# Altium PCB PCB.PcbDoc (part 1 of 2)
Units mm, origin at the board's own origin, x right, y up, seen from the top; angles counter-clockwise.
Board outline 72.26 x 43 mm, 4 copper layers (Top Layer, Int1 (GND), Int2 (PWR), Bottom Layer), stack 1.684 mm thick; 41 components, 43 nets, 235 pads, 199 vias.
Unrouted connection lines stored in the file: 1.
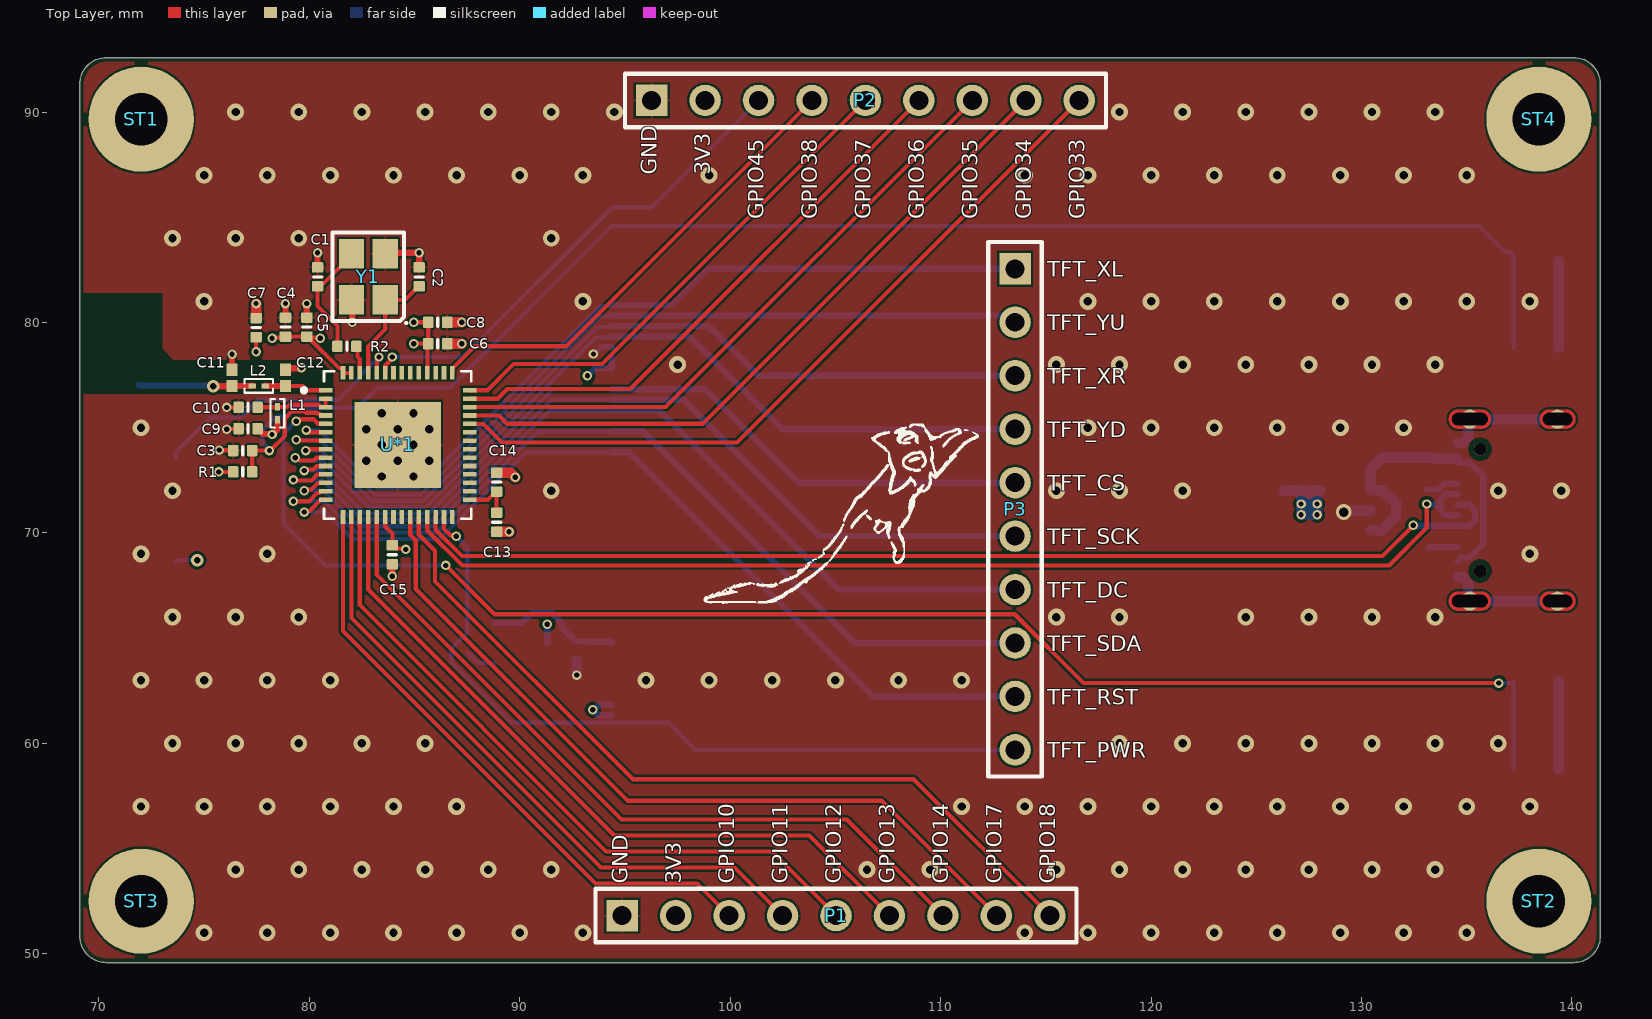
[diagram p0: Top Layer view]
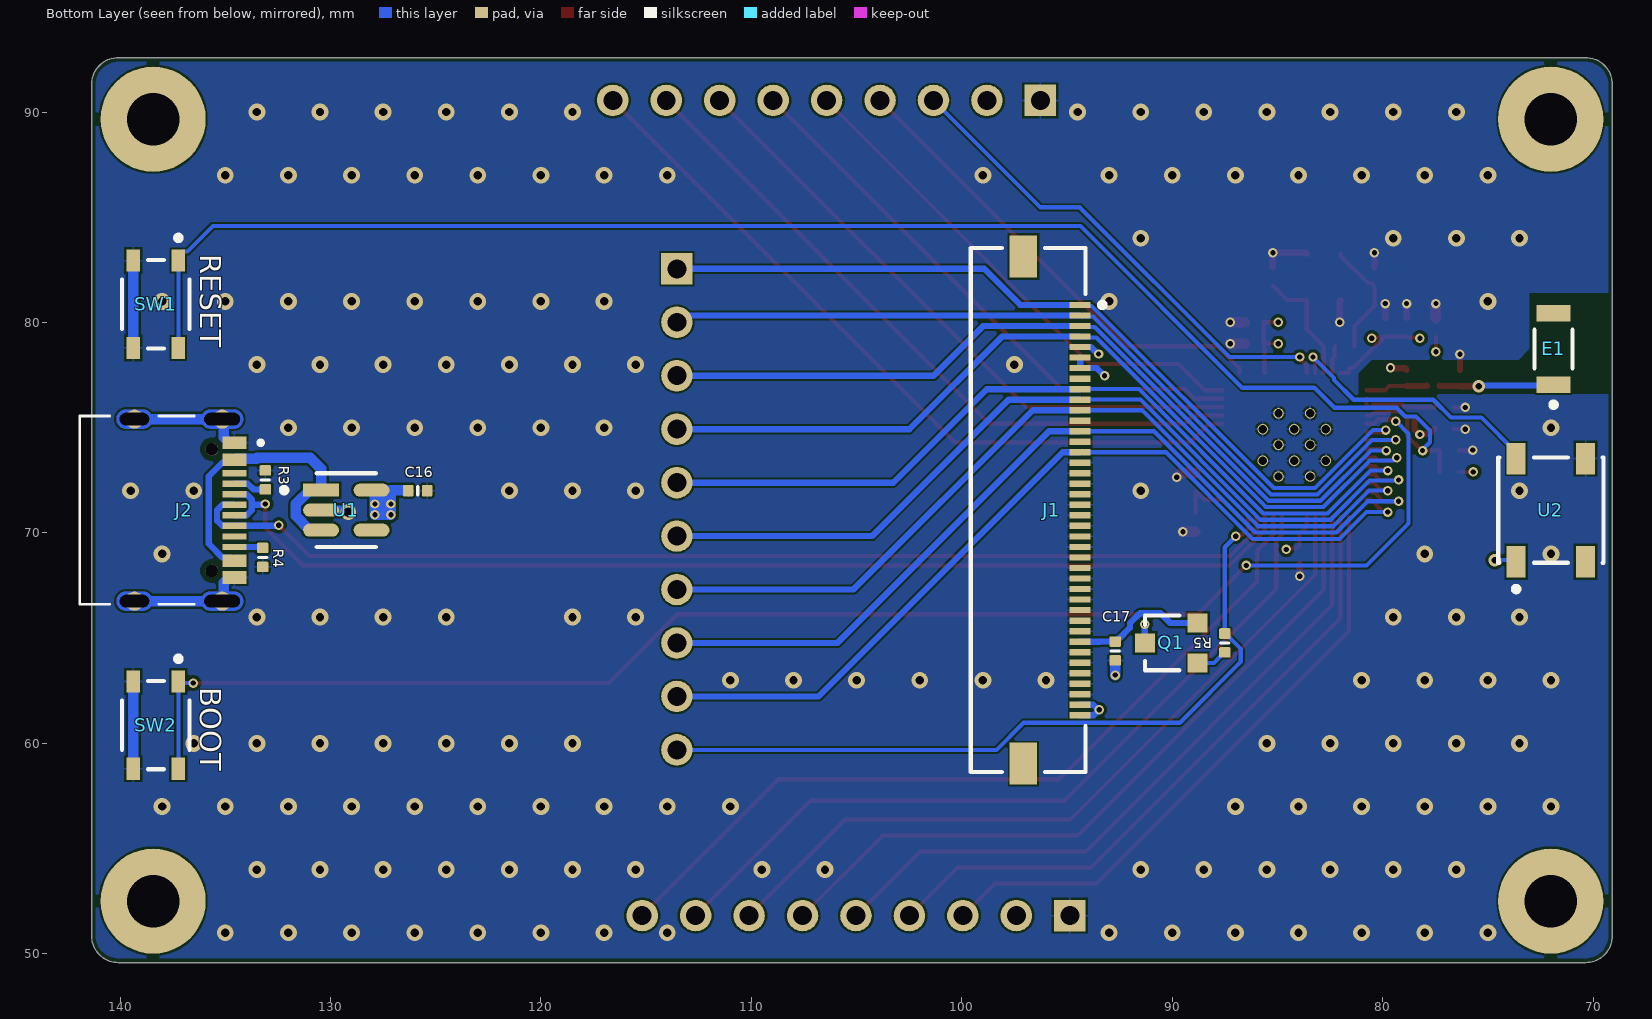
[diagram p1: Bottom Layer view, seen from below]
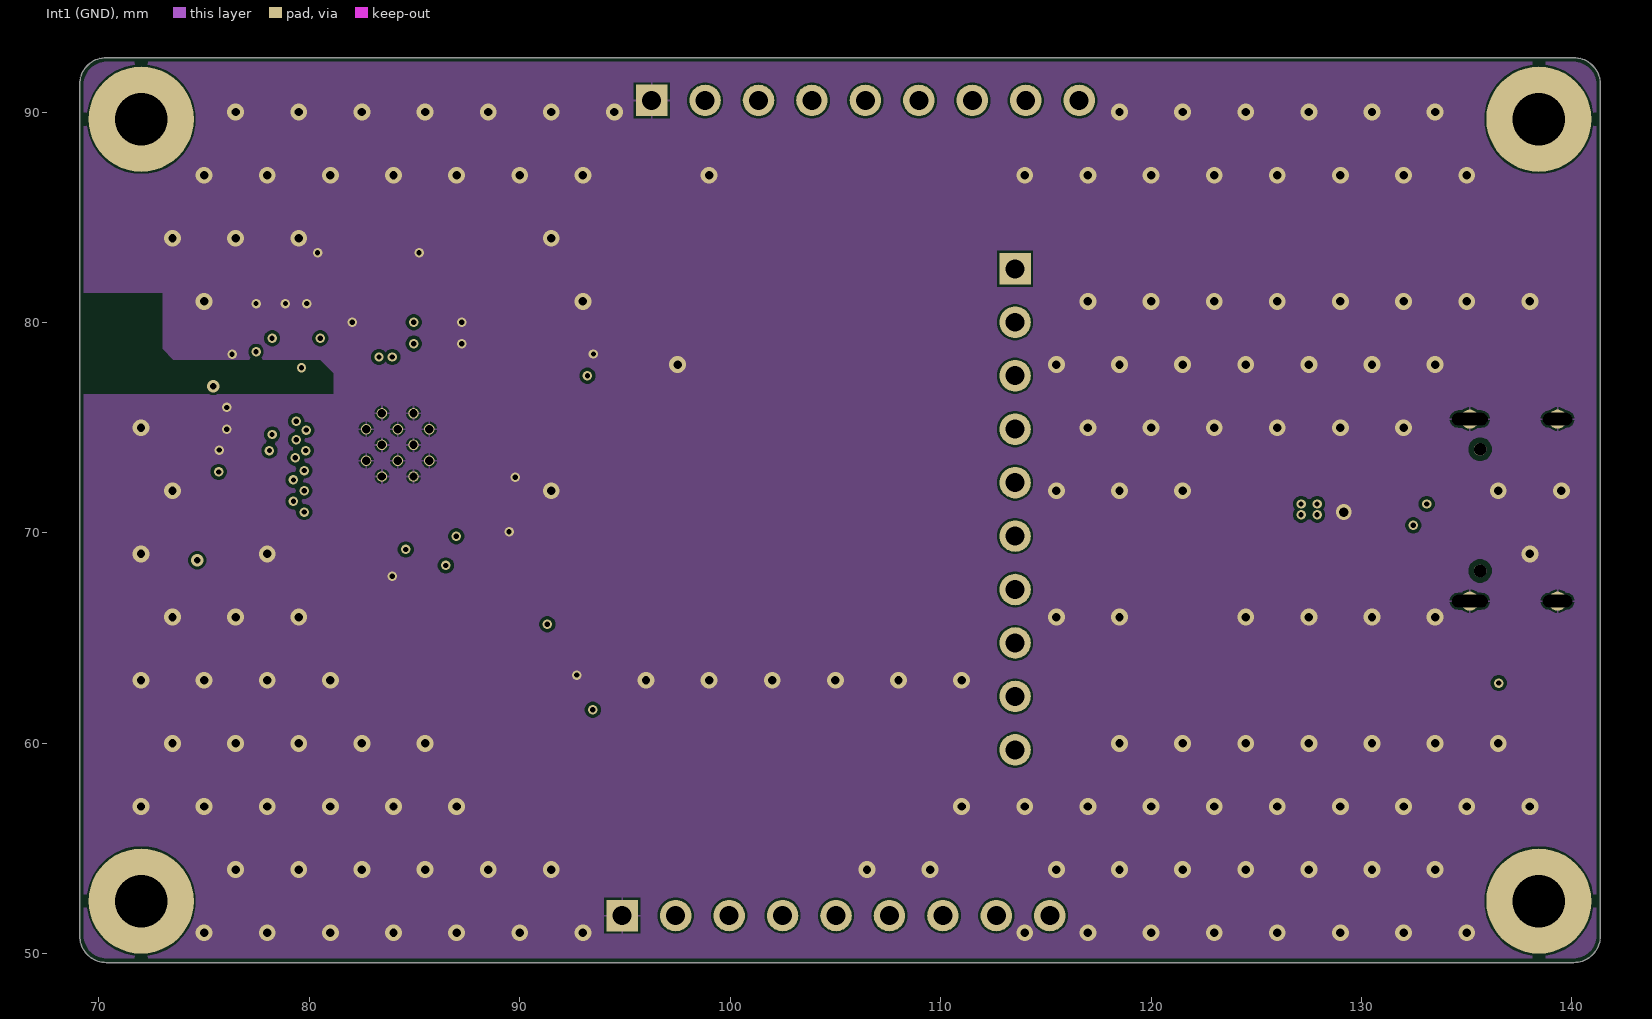
[diagram p2: Int1 (GND)]
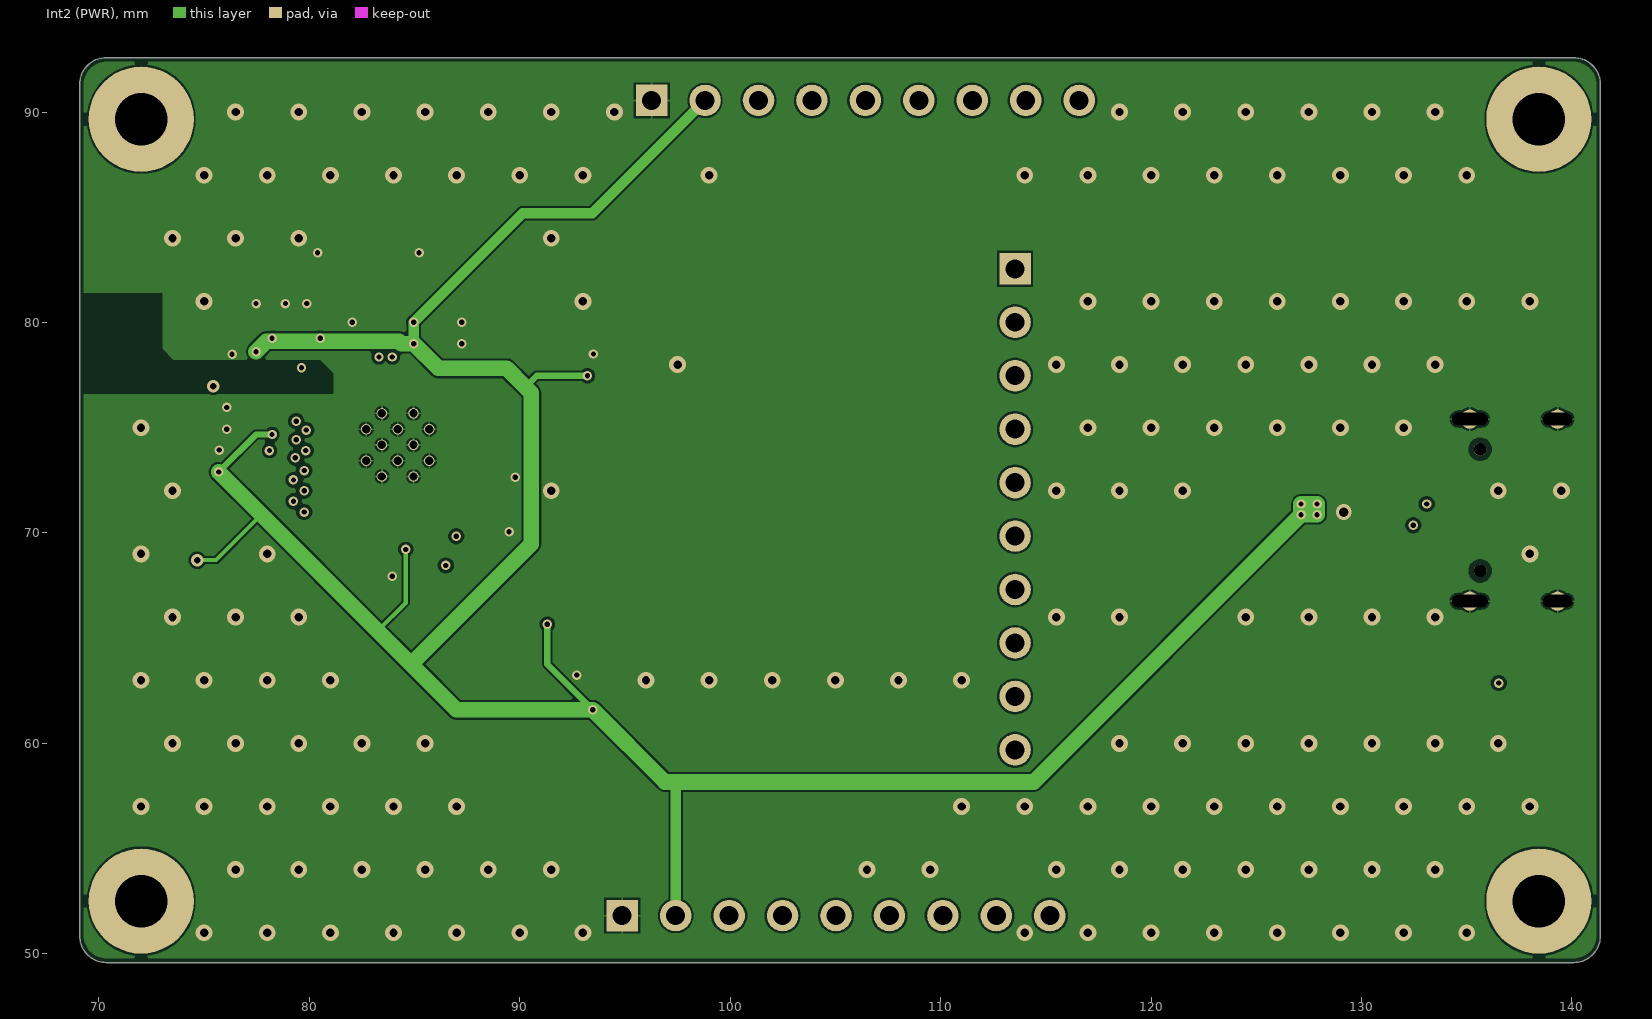
[diagram p3: Int2 (PWR)]
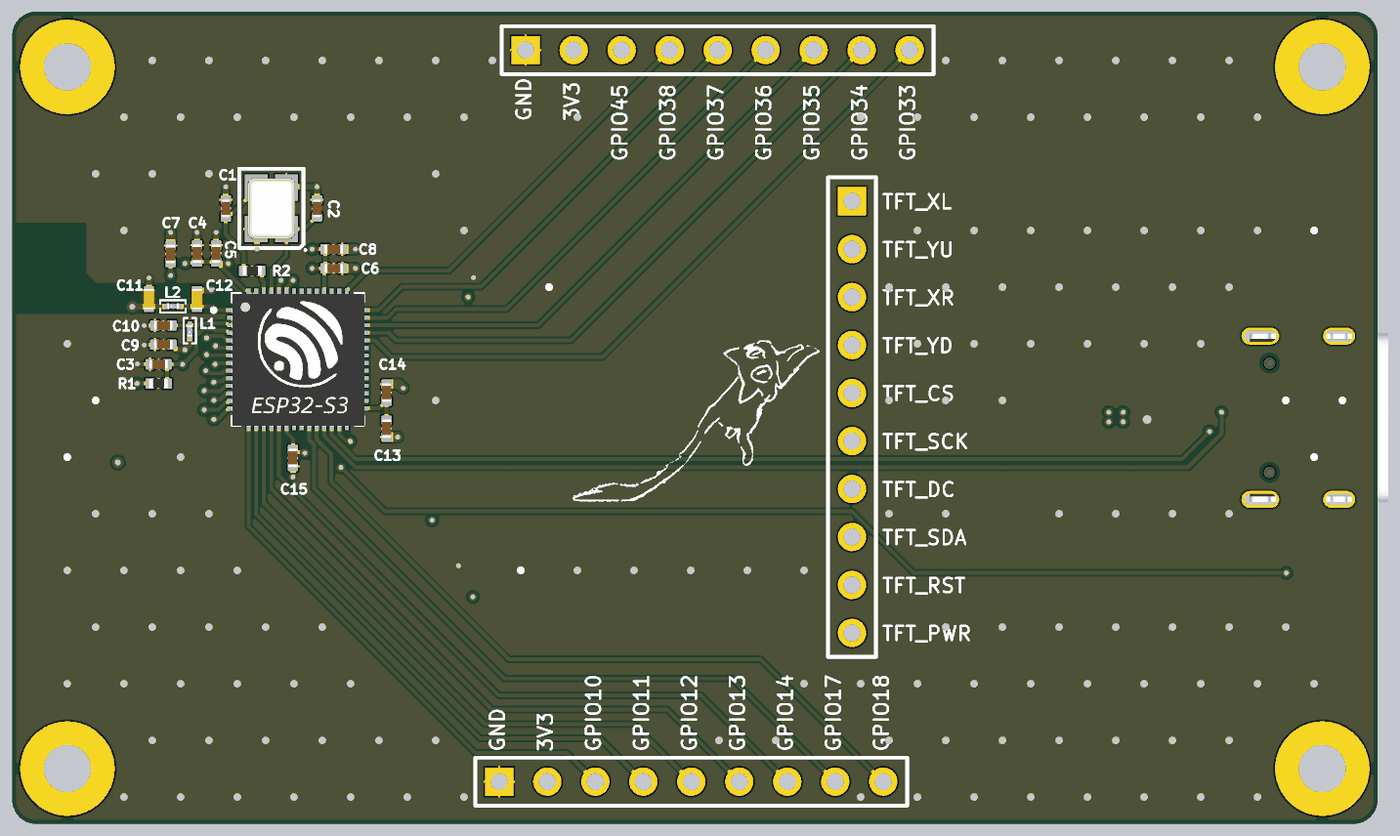
[diagram p4: 3D render of the assembled board from above, using the file's embedded part models]
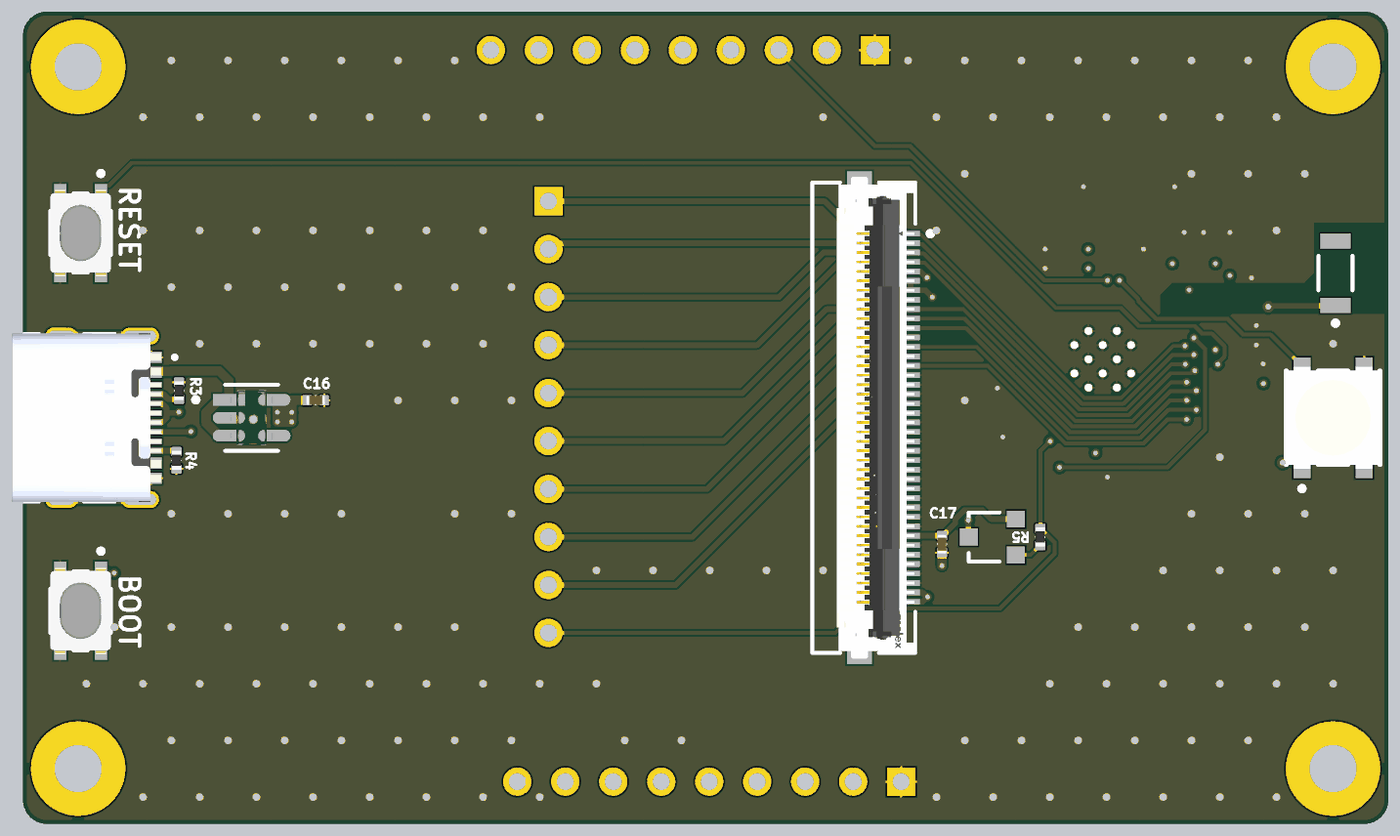
[diagram p5: 3D render of the assembled board from below, using the file's embedded part models]

## Layer stack, top to bottom
Top Solder: solder mask 0.0254, SM-001, Dk 4
Top Layer: signal copper 0.035
Dielectric 1: prepreg 0.1295, PP-017, Dk 4.3
Dielectric 2: prepreg 0.1295, PP-017, Dk 4.3
Int1 (GND): signal copper 0.0152
Dielectric 3: core 1.065, Core-039, Dk 4.8
Int2 (PWR): signal copper 0.0152
Dielectric 4: prepreg 0.1295, PP-017, Dk 4.3
Dielectric 5: prepreg 0.1295, PP-017, Dk 4.3
Bottom Layer: signal copper 0.035
Bottom Solder: solder mask 0.0254, SM-001, Dk 4

## Board outline
69.088,50.853 69.088,91.313 cw(c70.358,91.313) 70.358,92.583 140.081,92.583 cw(c140.081,91.313) 141.351,91.313 141.351,50.853 cw(c140.081,50.853) 140.081,49.583 70.358,49.583 cw(c70.358,50.853)

## Design rules (kind name [scope] priority, off if disabled: settings)
BoardOutlineClearance [All] p1: gap=0.2 ignorepadtopadclearanceinfootprint=FALSE
Clearance [All] p1: gap=0.102 ignorepadtopadclearanceinfootprint=FALSE except(0.127: Arc-Via Track-Via SMDPad-Via THPad-Via Via-Via Via-Fill Via-Poly Via-Region Via-Text; 0.25: Arc-Hole Track-Hole SMDPad-Hole THPad-Hole Via-Hole Fill-Hole Poly-Hole Region-Hole Text-Hole)
ComponentClearance [All] p1: gap=0.102 collisioncheckmode=3 verticalgap=0.102 showdistances=TRUE
DiffPairsRouting [All] p1: maxlimit=0.102 minlimit=0.102 mostfreqgap=0.102 toplayer_minwidth=0.102 toplayer_maxwidth=1816.048 toplayer_prefwidth=0.102 midlayer1_minwidth=0.102 midlayer1_maxwidth=1816.048 midlayer1_prefwidth=0.102 midlayer2_minwidth=0.102 midlayer2_maxwidth=1816.048 midlayer2_prefwidth=0.102 bottomlayer_minwidth=0.102 bottomlayer_maxwidth=1816.048 bottomlayer_prefwidth=0.102 maxuncoupledlength=12.7
Height [All] p1: minheight=0 maxheight=1816.048 prefheight=12.7
HoleSize [All] p1: absolutevalues=TRUE maxlimit=6.3 minlimit=0.2 maxpercent=80.000 minpercent=20.000
HoleToHoleClearance [All] p1: gap=0.25 allowstackedmicrovias=FALSE
MinimumAnnularRing [All] p1: minimumring=0.076
MinimumSolderMaskSliver [All] p1: minsoldermaskwidth=0
PlaneClearance [All] p1: clearance=0.102
PlaneConnect PlaneConnectPowerPads [InPadClass('PowerPads')] p1: planeconnectstyle=Direct reliefexpansion=0.508 reliefentries=4 reliefconductorwidth=0.254 reliefairgap=0.254
PlaneConnect [All] p2: pad.planeconnectstyle=Relief pad.reliefexpansion=0.3 pad.reliefentries=4 pad.reliefconductorwidth=0.102 pad.reliefairgap=0.102 via.planeconnectstyle=Direct via.reliefexpansion=0.3 via.reliefentries=4 via.reliefconductorwidth=0.127 via.reliefairgap=0.127
PolygonConnect PolygonConnectPowerPads [All vs (InPadClass('PowerPads'))] p1: connectstyle=Direct reliefconductorwidth=0.254 reliefentries=4 polygonreliefangle="90 Angle" airgapwidth=0.254
PolygonConnect [All] p2: thpad.connectstyle=Relief thpad.reliefconductorwidth=0.102 thpad.reliefentries=4 thpad.polygonreliefangle="90 Angle" thpad.airgapwidth=0.102 smdpad.connectstyle=Relief smdpad.reliefconductorwidth=0.102 smdpad.reliefentries=4 smdpad.polygonreliefangle="90 Angle" smdpad.airgapwidth=0.102 via.connectstyle=Direct via.reliefconductorwidth=0.127 via.reliefentries=4 via.polygonreliefangle="90 Angle" via.airgapwidth=0.127
RoutingVias [All] p1: holewidth=0.2 width=0.45 viastyle="Through Hole" minholewidth=0.2 minwidth=0.45 maxholewidth=6.3 maxwidth=6.55
SilkToSilkClearance [All] p1: silktosilkclearance=0
SilkToSolderMaskClearance [IsPad] p1: minsilkscreentomaskgap=0.102 clearancetoexposedcopper=TRUE
SolderMaskExpansion [All] p1: expansion=0.075 istentingtop=FALSE
Width [All] p1: maxlimit=1816.048 minlimit=0.102 preferedwidth=0.102
20 further rules are at their usual default settings.

## Classes and differential pairs
component class Components: C16 C17 J1 J2 P1 P2 P3 Q1 R3 R4 R5 ST1 ST2 ST3 ST4 U1 U2

## Components (designator, comment, footprint, x,y, rotation, side; value= is the part's Value field where it differs from the comment)
C1 "Capacitor 12pF +/-10% 50V 0402" CAPC0402(1005)33_L 80.391,82.169 r270 top value=8pF
C2 "Capacitor 12pF +/-10% 50V 0402" CAPC0402(1005)33_L 85.217,82.169 r270 top value=8pF
C3 "Capacitor 1µF +/-20% 10V 0402" CAPC0402(1005)60_L 76.835,73.914 r180 top value=1µF
C4 "Capacitor 1µF +/-20% 10V 0402" CAPC0402(1005)60_L 78.867,79.78 r90 top value=1µF
C5 "Capacitor 100nF +/-20% 10V 0402" CAPC0402(1005)60_L 79.883,79.78 r90 top value=100nF
C6 "Capacitor 1µF +/-20% 10V 0402" CAPC0402(1005)60_L 86.106,78.994 r0 top value=1µF
C7 "Capacitor 10µF +/-40% 6.3V 0402" CAPC0402(1005)60_L 77.47,79.756 r90 top value=10µF
C8 "Capacitor 1µF +/-20% 10V 0402" CAPC0402(1005)60_L 86.106,80.01 r0 top value=1µF
C9 "Capacitor 100nF +/-20% 10V 0402" CAPC0402(1005)60_L 77.089,74.954 r180 top value=100nF
C10 "Capacitor 100nF +/-20% 10V 0402" CAPC0402(1005)60_L 77.089,75.97 r180 top value=100nF
C11 "Capacitor 0.1 uF +/- 5% 16 V 0402" CAPC1005X56X25LL10T15 76.327,77.367 r90 top value=3.3pF
C12 "Capacitor 0.1 uF +/- 5% 16 V 0402" CAPC1005X56X25LL10T15 78.867,77.367 r90 top value=3.3pF
C13 "Capacitor 1µF +/-20% 10V 0402" CAPC0402(1005)60_L 88.9,70.509 r270 top value=1µF
C14 "Capacitor 100nF +/-20% 10V 0402" CAPC0402(1005)60_L 88.9,72.414 r90 top value=100nF
C15 "Capacitor 100nF +/-20% 10V 0402" CAPC0402(1005)60_L 83.947,68.961 r270 top value=100nF
C16 "Capacitor 2,2µF +/-20% 10V 0402" CAPC0402(1005)60_L 125.857,72.009 r180 bottom value=2.2µF
C17 "Capacitor 1µF +/-20% 10V 0402" CAPC0402(1005)60_L 92.71,64.389 r270 bottom value=1µF
E1 "2450AT18A100E" JT-2450AT18A100-2_V 71.882,78.74 r90 bottom
J1 "505110-4091" FP-505110-4091-MFG 96.851,71.083 r270 bottom
J2 "TYPE-C-31-M-12" HRO_TYPE-C-31-M-12 139.319,71.083 r270 bottom
L1 "2 nH" "IND 0201_0603" 78.486,75.692 r90 top
L2 "2nH" "IND 0201_0603" 77.597,76.986 r0 top value="2 nH"
P1 "Header 9" HDR1X9 94.869,51.816 r0 top
P2 "Header 9" HDR1X9 96.266,90.551 r0 top
P3 "Header 10" HDR1X10 113.538,82.55 r270 top
Q1 "2N7002" STM-SOT-23-3_V 90.043,64.77 r90 bottom
R1 "10KR2F" RESC0402(1005)_L 76.835,72.898 r0 top value=10k
R2 "0R2J" RESC0402(1005)_L 81.788,78.867 r0 top value=0
R3 "0R2J" RESC0402(1005)_L 133.096,72.517 r270 bottom value=5k1
R4 "0R2J" RESC0402(1005)_L 133.223,68.834 r270 bottom value=5k1
R5 "0R2J" RESC0402(1005)_L 87.503,64.77 r270 bottom value=5k1
ST1 "PTH-M2D5X5" PTH-M2D5X5 72.009,89.662 r0 top
ST2 "PTH-M2D5X5" PTH-M2D5X5 138.43,52.504 r0 top
ST3 "PTH-M2D5X5" PTH-M2D5X5 72.009,52.504 r0 top
ST4 "PTH-M2D5X5" PTH-M2D5X5 138.43,89.662 r0 top
SW1 "PTS810SJM250SMTRLFS" FP-PTS810SJM250SMTRLFS-MFG 138.303,80.866 r270 bottom
SW2 "PTS810SJM250SMTRLFS" FP-PTS810SJM250SMTRLFS-MFG 138.303,60.866 r270 bottom
U1 "AP2112K-3.3TRG1" FP-SOT25-IPC_A 129.249,71.083 r180 bottom
U2 "1655" ADA-RGB-1655_V 72.009,71.083 r90 bottom
U*1 "ESP32-S3FN8" PCBComponent_1 84.201,74.18 r0 top
Y1 "40 MHz" "NDK NX3225SA" 82.804,82.169 r90 top

## Footprints (in the part's own frame and the unit in brackets; to place one, negate y for a bottom-side part, rotate by r counter-clockwise, add the part's x,y. Pads: shape width x height; smd on the part's side, far side on the other; paste and mask are expansions set on the pad)
ADA-RGB-1655_V [mm] "SMD, 4-Leads, Body 5x5mm"
  rect 1.5x0.9 smd: 1(-2.45,1.65) 2(-2.45,-1.65) 3(2.45,-1.65) 4(2.45,1.65)
  silkscreen extent -3.87,-2.5 2.5,2.5, body extent -2.7,-2.5 2.7,2.5, height 1.68
CAPC0402(1005)33_L [mm] "Chip Capacitor, Body 1.0x0.5mm, Height 0.33mm, IPC High Density"
  rrect25% 0.5x0.55 smd: 1(-0.45,0) 2(0.45,0)
  silkscreen extent 0,-0.2 0,0.2, body extent -0.5,-0.25 0.5,0.25, height 0.55
CAPC0402(1005)60_L [mm] "Chip Capacitor, Body 1.0x0.5mm, Height 0.6mm, IPC High Density"
  rrect25% 0.5x0.55 smd: 1(-0.45,0) 2(0.45,0)
  silkscreen extent 0,-0.2 0,0.2, body extent -0.5,-0.25 0.5,0.25, height 0.6
CAPC1005X56X25LL10T15 [mm] "Chip Capacitor, 2-Leads, Body 1.10x0.60mm, IPC High Density"
  rect 0.58x0.54 smd: 1(-0.39,0) 2(0.39,0)
  body extent -0.55,-0.3 0.55,0.3, height 0.56
FP-505110-4091-MFG [mm]
  rect 0.3x1 smd paste+0 mask+0: 1(-9.75,2.475) 2(-9.25,2.475) 3(-8.75,2.475) 4(-8.25,2.475) 5(-7.75,2.475) 6(-7.25,2.475) 7(-6.75,2.475) 8(-6.25,2.475) 9(-5.75,2.475) 10(-5.25,2.475) 11(-4.75,2.475) 12(-4.25,2.475) 13(-3.75,2.475) 14(-3.25,2.475) 15(-2.75,2.475) 16(-2.25,2.475) 17(-1.75,2.475) 18(-1.25,2.475) 19(-0.75,2.475) 20(-0.25,2.475) 21(0.25,2.475) 22(0.75,2.475) 23(1.25,2.475) 24(1.75,2.475) 25(2.25,2.475) 26(2.75,2.475) 27(3.25,2.475) 28(3.75,2.475) 29(4.25,2.475) 30(4.75,2.475) 31(5.25,2.475) 32(5.75,2.475) 33(6.25,2.475) 34(6.75,2.475) 35(7.25,2.475) 36(7.75,2.475) 37(8.25,2.475) 38(8.75,2.475) 39(9.25,2.475) 40(9.75,2.475)
  rect 2x1.3 smd paste+0 mask+0: 41(-12.05,-0.225) 42(12.05,-0.225)
  silkscreen extent -12.45,-2.73 12.45,3.65, body extent -12.75,-1.43 12.75,2.68, height 4.15
FP-PTS810SJM250SMTRLFS-MFG [mm]
  rect 1.05x0.65 smd paste+0 mask+0: 1(-2.075,1.075) 2(2.075,1.075) 3(-2.075,-1.075) 4(2.075,-1.075)
  silkscreen extent -3.27,-1.6 2.1,1.6, body extent -2.3,-1.6 2.3,1.6, height 2.7
FP-SOT25-IPC_A [mm]
  rect 1.707x0.616 smd paste+0 mask+0: 1(-1.201,0.95)
  rrect100% 1.707x0.616 smd paste+0 mask+0: 2(-1.201,0) 3(-1.201,-0.95) 4(1.201,-0.95) 5(1.201,0.95)
  silkscreen extent -3.08,-1.75 1.4,1.75, body extent -1.4,-1.47 1.4,1.45, height 1.45
HDR1X9 [mm] "Connector; Header; 9 Position"
  rect 1.5x1.5 hole 0.9: 1(0,0)
  round 1.5 hole 0.9: 2(2.54,0) 3(5.08,0) 4(7.62,0) 5(10.16,0) 6(12.7,0) 7(15.24,0) 8(17.78,0) 9(20.32,0)
  silkscreen extent -1.27,-1.27 21.59,1.27
HDR1X10 [mm] "Connector; Header; 10 Position"
  rect 1.5x1.5 hole 0.9: 1(0,0)
  round 1.5 hole 0.9: 2(2.54,0) 3(5.08,0) 4(7.62,0) 5(10.16,0) 6(12.7,0) 7(15.24,0) 8(17.78,0) 9(20.32,0) 10(22.86,0)
  silkscreen extent -1.27,-1.27 24.13,1.27
HRO_TYPE-C-31-M-12 [mm]
  rect 0.6x1.14 smd mask+0.05: A1/B12(-3.2,4.75) A4/B9(-2.4,4.75) B1/A12(3.2,4.75) B4/A9(2.4,4.75)
  rect 0.3x1.14 smd mask+0.05: A5(-1.25,4.75) A6(-0.25,4.75) A7(0.25,4.75) A8(1.25,4.75) B5(1.75,4.75) B6(0.75,4.75) B7(-0.75,4.75) B8(-1.75,4.75)
  round 0.9 hole 0.6 slot 1.7 at 90 deg mask+0: S1(-4.325,4.17) S2(4.325,4.17)
  round 0.9 hole 0.6 slot 1.4 at 90 deg mask+0: S3(-4.325,0) S4(4.325,0)
  round 0.6 hole 0.6 unplated: ""(-2.89,3.68) ""(2.89,3.68)
  Top Layer region: 4.349,0.849 4.372,0.848 4.395,0.844 4.419,0.84 4.441,0.835 4.464,0.828 4.486,0.82 4.508,0.811 4.529,0.801 4.55,0.79 4.57,0.777 4.59,0.764 4.608,0.75 4.626,0.734 4.643,0.718 4.659,0.701 4.675,0.683 4.689,0.665 4.702,0.645 4.715,0.625 4.726,0.604 4.736,0.583 4.745,0.561 4.753,0.539 4.76,0.516 4.765,0.494 4.769,0.47 4.773,0.447 4.774,0.424 4.775,0.4 4.775,-0.4 4.774,-0.424 4.773,-0.447 4.769,-0.47 4.765,-0.494 4.76,-0.516 4.753,-0.539 4.745,-0.561 4.736,-0.583 4.726,-0.604 4.715,-0.625 4.702,-0.645 4.689,-0.665 4.675,-0.683 4.659,-0.701 4.643,-0.718 4.626,-0.734 4.608,-0.75 4.59,-0.764 4.57,-0.777 4.55,-0.79 4.529,-0.801 4.508,-0.811 4.486,-0.82 4.464,-0.828 4.441,-0.835 4.419,-0.84 4.395,-0.844 4.372,-0.848 4.349,-0.849 4.325,-0.85 4.301,-0.849 4.278,-0.848 4.255,-0.844 4.231,-0.84 4.209,-0.835 4.186,-0.828 4.164,-0.82 4.142,-0.811 4.121,-0.801 4.1,-0.79 4.08,-0.777 4.06,-0.764 4.042,-0.75 4.024,-0.734 4.007,-0.718 3.991,-0.701 3.975,-0.683 3.961,-0.665 3.948,-0.645 3.935,-0.625 3.924,-0.604 3.914,-0.583 3.905,-0.561 3.897,-0.539 3.89,-0.516 3.885,-0.494 3.881,-0.47 3.877,-0.447 3.876,-0.424 3.875,-0.4 3.875,0.4 3.876,0.424 3.877,0.447 3.881,0.47 3.885,0.494 3.89,0.516 3.897,0.539 3.905,0.561 3.914,0.583 3.924,0.604 3.935,0.625 3.948,0.645 3.961,0.665 3.975,0.683 3.991,0.701 4.007,0.718 4.024,0.734 4.042,0.75 4.06,0.764 4.08,0.777 4.1,0.79 4.121,0.801 4.142,0.811 4.164,0.82 4.186,0.828 4.209,0.835 4.231,0.84 4.255,0.844 4.278,0.848 4.301,0.849 4.325,0.85
  Top Layer region: -4.301,0.849 -4.278,0.848 -4.255,0.844 -4.231,0.84 -4.209,0.835 -4.186,0.828 -4.164,0.82 -4.142,0.811 -4.121,0.801 -4.1,0.79 -4.08,0.777 -4.06,0.764 -4.042,0.75 -4.024,0.734 -4.007,0.718 -3.991,0.701 -3.975,0.683 -3.961,0.665 -3.948,0.645 -3.935,0.625 -3.924,0.604 -3.914,0.583 -3.905,0.561 -3.897,0.539 -3.89,0.516 -3.885,0.494 -3.881,0.47 -3.877,0.447 -3.876,0.424 -3.875,0.4 -3.875,-0.4 -3.876,-0.424 -3.877,-0.447 -3.881,-0.47 -3.885,-0.494 -3.89,-0.516 -3.897,-0.539 -3.905,-0.561 -3.914,-0.583 -3.924,-0.604 -3.935,-0.625 -3.948,-0.645 -3.961,-0.665 -3.975,-0.683 -3.991,-0.701 -4.007,-0.718 -4.024,-0.734 -4.042,-0.75 -4.06,-0.764 -4.08,-0.777 -4.1,-0.79 -4.121,-0.801 -4.142,-0.811 -4.164,-0.82 -4.186,-0.828 -4.209,-0.835 -4.231,-0.84 -4.255,-0.844 -4.278,-0.848 -4.301,-0.849 -4.325,-0.85 -4.349,-0.849 -4.372,-0.848 -4.395,-0.844 -4.419,-0.84 -4.441,-0.835 -4.464,-0.828 -4.486,-0.82 -4.508,-0.811 -4.529,-0.801 -4.55,-0.79 -4.57,-0.777 -4.59,-0.764 -4.608,-0.75 -4.626,-0.734 -4.643,-0.718 -4.659,-0.701 -4.675,-0.683 -4.689,-0.665 -4.702,-0.645 -4.715,-0.625 -4.726,-0.604 -4.736,-0.583 -4.745,-0.561 -4.753,-0.539 -4.76,-0.516 -4.765,-0.494 -4.769,-0.47 -4.773,-0.447 -4.774,-0.424 -4.775,-0.4 -4.775,0.4 -4.774,0.424 -4.773,0.447 -4.769,0.47 -4.765,0.494 -4.76,0.516 -4.753,0.539 -4.745,0.561 -4.736,0.583 -4.726,0.604 -4.715,0.625 -4.702,0.645 -4.689,0.665 -4.675,0.683 -4.659,0.701 -4.643,0.718 -4.626,0.734 -4.608,0.75 -4.59,0.764 -4.57,0.777 -4.55,0.79 -4.529,0.801 -4.508,0.811 -4.486,0.82 -4.464,0.828 -4.441,0.835 -4.419,0.84 -4.395,0.844 -4.372,0.848 -4.349,0.849 -4.325,0.85
  Top Layer region: 4.349,5.169 4.372,5.168 4.395,5.164 4.419,5.16 4.441,5.155 4.464,5.148 4.486,5.14 4.508,5.131 4.529,5.121 4.55,5.11 4.57,5.097 4.59,5.084 4.608,5.07 4.626,5.054 4.643,5.038 4.659,5.021 4.675,5.003 4.689,4.985 4.702,4.965 4.715,4.945 4.726,4.924 4.736,4.903 4.745,4.881 4.753,4.859 4.76,4.836 4.765,4.814 4.769,4.79 4.773,4.767 4.774,4.744 4.775,4.72 4.775,3.62 4.774,3.596 4.773,3.573 4.769,3.55 4.765,3.526 4.76,3.504 4.753,3.481 4.745,3.459 4.736,3.437 4.726,3.416 4.715,3.395 4.702,3.375 4.689,3.355 4.675,3.337 4.659,3.319 4.643,3.302 4.626,3.286 4.608,3.27 4.59,3.256 4.57,3.243 4.55,3.23 4.529,3.219 4.508,3.209 4.486,3.2 4.464,3.192 4.441,3.185 4.419,3.18 4.395,3.176 4.372,3.172 4.349,3.171 4.325,3.17 4.301,3.171 4.278,3.172 4.255,3.176 4.231,3.18 4.209,3.185 4.186,3.192 4.164,3.2 4.142,3.209 4.121,3.219 4.1,3.23 4.08,3.243 4.06,3.256 4.042,3.27 4.024,3.286 4.007,3.302 3.991,3.319 3.975,3.337 3.961,3.355 3.948,3.375 3.935,3.395 3.924,3.416 3.914,3.437 3.905,3.459 3.897,3.481 3.89,3.504 3.885,3.526 3.881,3.55 3.877,3.573 3.876,3.596 3.875,3.62 3.875,4.72 3.876,4.744 3.877,4.767 3.881,4.79 3.885,4.814 3.89,4.836 3.897,4.859 3.905,4.881 3.914,4.903 3.924,4.924 3.935,4.945 3.948,4.965 3.961,4.985 3.975,5.003 3.991,5.021 4.007,5.038 4.024,5.054 4.042,5.07 4.06,5.084 4.08,5.097 4.1,5.11 4.121,5.121 4.142,5.131 4.164,5.14 4.186,5.148 4.209,5.155 4.231,5.16 4.255,5.164 4.278,5.168 4.301,5.169 4.325,5.17
  Top Layer region: -4.301,5.169 -4.278,5.168 -4.255,5.164 -4.231,5.16 -4.209,5.155 -4.186,5.148 -4.164,5.14 -4.142,5.131 -4.121,5.121 -4.1,5.11 -4.08,5.097 -4.06,5.084 -4.042,5.07 -4.024,5.054 -4.007,5.038 -3.991,5.021 -3.975,5.003 -3.961,4.985 -3.948,4.965 -3.935,4.945 -3.924,4.924 -3.914,4.903 -3.905,4.881 -3.897,4.859 -3.89,4.836 -3.885,4.814 -3.881,4.79 -3.877,4.767 -3.876,4.744 -3.875,4.72 -3.875,3.62 -3.876,3.596 -3.877,3.573 -3.881,3.55 -3.885,3.526 -3.89,3.504 -3.897,3.481 -3.905,3.459 -3.914,3.437 -3.924,3.416 -3.935,3.395 -3.948,3.375 -3.961,3.355 -3.975,3.337 -3.991,3.319 -4.007,3.302 -4.024,3.286 -4.042,3.27 -4.06,3.256 -4.08,3.243 -4.1,3.23 -4.121,3.219 -4.142,3.209 -4.164,3.2 -4.186,3.192 -4.209,3.185 -4.231,3.18 -4.255,3.176 -4.278,3.172 -4.301,3.171 -4.325,3.17 -4.349,3.171 -4.372,3.172 -4.395,3.176 -4.419,3.18 -4.441,3.185 -4.464,3.192 -4.486,3.2 -4.508,3.209 -4.529,3.219 -4.55,3.23 -4.57,3.243 -4.59,3.256 -4.608,3.27 -4.626,3.286 -4.643,3.302 -4.659,3.319 -4.675,3.337 -4.689,3.355 -4.702,3.375 -4.715,3.395 -4.726,3.416 -4.736,3.437 -4.745,3.459 -4.753,3.481 -4.76,3.504 -4.765,3.526 -4.769,3.55 -4.773,3.573 -4.774,3.596 -4.775,3.62 -4.775,4.72 -4.774,4.744 -4.773,4.767 -4.769,4.79 -4.765,4.814 -4.76,4.836 -4.753,4.859 -4.745,4.881 -4.736,4.903 -4.726,4.924 -4.715,4.945 -4.702,4.965 -4.689,4.985 -4.675,5.003 -4.659,5.021 -4.643,5.038 -4.626,5.054 -4.608,5.07 -4.59,5.084 -4.57,5.097 -4.55,5.11 -4.529,5.121 -4.508,5.131 -4.486,5.14 -4.464,5.148 -4.441,5.155 -4.419,5.16 -4.395,5.164 -4.372,5.168 -4.349,5.169 -4.325,5.17
  Bottom Layer region: 4.349,0.849 4.372,0.848 4.395,0.844 4.419,0.84 4.441,0.835 4.464,0.828 4.486,0.82 4.508,0.811 4.529,0.801 4.55,0.79 4.57,0.777 4.59,0.764 4.608,0.75 4.626,0.734 4.643,0.718 4.659,0.701 4.675,0.683 4.689,0.665 4.702,0.645 4.715,0.625 4.726,0.604 4.736,0.583 4.745,0.561 4.753,0.539 4.76,0.516 4.765,0.494 4.769,0.47 4.773,0.447 4.774,0.424 4.775,0.4 4.775,-0.4 4.774,-0.424 4.773,-0.447 4.769,-0.47 4.765,-0.494 4.76,-0.516 4.753,-0.539 4.745,-0.561 4.736,-0.583 4.726,-0.604 4.715,-0.625 4.702,-0.645 4.689,-0.665 4.675,-0.683 4.659,-0.701 4.643,-0.718 4.626,-0.734 4.608,-0.75 4.59,-0.764 4.57,-0.777 4.55,-0.79 4.529,-0.801 4.508,-0.811 4.486,-0.82 4.464,-0.828 4.441,-0.835 4.419,-0.84 4.395,-0.844 4.372,-0.848 4.349,-0.849 4.325,-0.85 4.301,-0.849 4.278,-0.848 4.255,-0.844 4.231,-0.84 4.209,-0.835 4.186,-0.828 4.164,-0.82 4.142,-0.811 4.121,-0.801 4.1,-0.79 4.08,-0.777 4.06,-0.764 4.042,-0.75 4.024,-0.734 4.007,-0.718 3.991,-0.701 3.975,-0.683 3.961,-0.665 3.948,-0.645 3.935,-0.625 3.924,-0.604 3.914,-0.583 3.905,-0.561 3.897,-0.539 3.89,-0.516 3.885,-0.494 3.881,-0.47 3.877,-0.447 3.876,-0.424 3.875,-0.4 3.875,0.4 3.876,0.424 3.877,0.447 3.881,0.47 3.885,0.494 3.89,0.516 3.897,0.539 3.905,0.561 3.914,0.583 3.924,0.604 3.935,0.625 3.948,0.645 3.961,0.665 3.975,0.683 3.991,0.701 4.007,0.718 4.024,0.734 4.042,0.75 4.06,0.764 4.08,0.777 4.1,0.79 4.121,0.801 4.142,0.811 4.164,0.82 4.186,0.828 4.209,0.835 4.231,0.84 4.255,0.844 4.278,0.848 4.301,0.849 4.325,0.85
  Bottom Layer region: -4.301,0.849 -4.278,0.848 -4.255,0.844 -4.231,0.84 -4.209,0.835 -4.186,0.828 -4.164,0.82 -4.142,0.811 -4.121,0.801 -4.1,0.79 -4.08,0.777 -4.06,0.764 -4.042,0.75 -4.024,0.734 -4.007,0.718 -3.991,0.701 -3.975,0.683 -3.961,0.665 -3.948,0.645 -3.935,0.625 -3.924,0.604 -3.914,0.583 -3.905,0.561 -3.897,0.539 -3.89,0.516 -3.885,0.494 -3.881,0.47 -3.877,0.447 -3.876,0.424 -3.875,0.4 -3.875,-0.4 -3.876,-0.424 -3.877,-0.447 -3.881,-0.47 -3.885,-0.494 -3.89,-0.516 -3.897,-0.539 -3.905,-0.561 -3.914,-0.583 -3.924,-0.604 -3.935,-0.625 -3.948,-0.645 -3.961,-0.665 -3.975,-0.683 -3.991,-0.701 -4.007,-0.718 -4.024,-0.734 -4.042,-0.75 -4.06,-0.764 -4.08,-0.777 -4.1,-0.79 -4.121,-0.801 -4.142,-0.811 -4.164,-0.82 -4.186,-0.828 -4.209,-0.835 -4.231,-0.84 -4.255,-0.844 -4.278,-0.848 -4.301,-0.849 -4.325,-0.85 -4.349,-0.849 -4.372,-0.848 -4.395,-0.844 -4.419,-0.84 -4.441,-0.835 -4.464,-0.828 -4.486,-0.82 -4.508,-0.811 -4.529,-0.801 -4.55,-0.79 -4.57,-0.777 -4.59,-0.764 -4.608,-0.75 -4.626,-0.734 -4.643,-0.718 -4.659,-0.701 -4.675,-0.683 -4.689,-0.665 -4.702,-0.645 -4.715,-0.625 -4.726,-0.604 -4.736,-0.583 -4.745,-0.561 -4.753,-0.539 -4.76,-0.516 -4.765,-0.494 -4.769,-0.47 -4.773,-0.447 -4.774,-0.424 -4.775,-0.4 -4.775,0.4 -4.774,0.424 -4.773,0.447 -4.769,0.47 -4.765,0.494 -4.76,0.516 -4.753,0.539 -4.745,0.561 -4.736,0.583 -4.726,0.604 -4.715,0.625 -4.702,0.645 -4.689,0.665 -4.675,0.683 -4.659,0.701 -4.643,0.718 -4.626,0.734 -4.608,0.75 -4.59,0.764 -4.57,0.777 -4.55,0.79 -4.529,0.801 -4.508,0.811 -4.486,0.82 -4.464,0.828 -4.441,0.835 -4.419,0.84 -4.395,0.844 -4.372,0.848 -4.349,0.849 -4.325,0.85
  Bottom Layer region: 4.349,5.169 4.372,5.168 4.395,5.164 4.419,5.16 4.441,5.155 4.464,5.148 4.486,5.14 4.508,5.131 4.529,5.121 4.55,5.11 4.57,5.097 4.59,5.084 4.608,5.07 4.626,5.054 4.643,5.038 4.659,5.021 4.675,5.003 4.689,4.985 4.702,4.965 4.715,4.945 4.726,4.924 4.736,4.903 4.745,4.881 4.753,4.859 4.76,4.836 4.765,4.814 4.769,4.79 4.773,4.767 4.774,4.744 4.775,4.72 4.775,3.62 4.774,3.596 4.773,3.573 4.769,3.55 4.765,3.526 4.76,3.504 4.753,3.481 4.745,3.459 4.736,3.437 4.726,3.416 4.715,3.395 4.702,3.375 4.689,3.355 4.675,3.337 4.659,3.319 4.643,3.302 4.626,3.286 4.608,3.27 4.59,3.256 4.57,3.243 4.55,3.23 4.529,3.219 4.508,3.209 4.486,3.2 4.464,3.192 4.441,3.185 4.419,3.18 4.395,3.176 4.372,3.172 4.349,3.171 4.325,3.17 4.301,3.171 4.278,3.172 4.255,3.176 4.231,3.18 4.209,3.185 4.186,3.192 4.164,3.2 4.142,3.209 4.121,3.219 4.1,3.23 4.08,3.243 4.06,3.256 4.042,3.27 4.024,3.286 4.007,3.302 3.991,3.319 3.975,3.337 3.961,3.355 3.948,3.375 3.935,3.395 3.924,3.416 3.914,3.437 3.905,3.459 3.897,3.481 3.89,3.504 3.885,3.526 3.881,3.55 3.877,3.573 3.876,3.596 3.875,3.62 3.875,4.72 3.876,4.744 3.877,4.767 3.881,4.79 3.885,4.814 3.89,4.836 3.897,4.859 3.905,4.881 3.914,4.903 3.924,4.924 3.935,4.945 3.948,4.965 3.961,4.985 3.975,5.003 3.991,5.021 4.007,5.038 4.024,5.054 4.042,5.07 4.06,5.084 4.08,5.097 4.1,5.11 4.121,5.121 4.142,5.131 4.164,5.14 4.186,5.148 4.209,5.155 4.231,5.16 4.255,5.164 4.278,5.168 4.301,5.169 4.325,5.17
  Bottom Layer region: -4.301,5.169 -4.278,5.168 -4.255,5.164 -4.231,5.16 -4.209,5.155 -4.186,5.148 -4.164,5.14 -4.142,5.131 -4.121,5.121 -4.1,5.11 -4.08,5.097 -4.06,5.084 -4.042,5.07 -4.024,5.054 -4.007,5.038 -3.991,5.021 -3.975,5.003 -3.961,4.985 -3.948,4.965 -3.935,4.945 -3.924,4.924 -3.914,4.903 -3.905,4.881 -3.897,4.859 -3.89,4.836 -3.885,4.814 -3.881,4.79 -3.877,4.767 -3.876,4.744 -3.875,4.72 -3.875,3.62 -3.876,3.596 -3.877,3.573 -3.881,3.55 -3.885,3.526 -3.89,3.504 -3.897,3.481 -3.905,3.459 -3.914,3.437 -3.924,3.416 -3.935,3.395 -3.948,3.375 -3.961,3.355 -3.975,3.337 -3.991,3.319 -4.007,3.302 -4.024,3.286 -4.042,3.27 -4.06,3.256 -4.08,3.243 -4.1,3.23 -4.121,3.219 -4.142,3.209 -4.164,3.2 -4.186,3.192 -4.209,3.185 -4.231,3.18 -4.255,3.176 -4.278,3.172 -4.301,3.171 -4.325,3.17 -4.349,3.171 -4.372,3.172 -4.395,3.176 -4.419,3.18 -4.441,3.185 -4.464,3.192 -4.486,3.2 -4.508,3.209 -4.529,3.219 -4.55,3.23 -4.57,3.243 -4.59,3.256 -4.608,3.27 -4.626,3.286 -4.643,3.302 -4.659,3.319 -4.675,3.337 -4.689,3.355 -4.702,3.375 -4.715,3.395 -4.726,3.416 -4.736,3.437 -4.745,3.459 -4.753,3.481 -4.76,3.504 -4.765,3.526 -4.769,3.55 -4.773,3.573 -4.774,3.596 -4.775,3.62 -4.775,4.72 -4.774,4.744 -4.773,4.767 -4.769,4.79 -4.765,4.814 -4.76,4.836 -4.753,4.859 -4.745,4.881 -4.736,4.903 -4.726,4.924 -4.715,4.945 -4.702,4.965 -4.689,4.985 -4.675,5.003 -4.659,5.021 -4.643,5.038 -4.626,5.054 -4.608,5.07 -4.59,5.084 -4.57,5.097 -4.55,5.11 -4.529,5.121 -4.508,5.131 -4.486,5.14 -4.464,5.148 -4.441,5.155 -4.419,5.16 -4.395,5.164 -4.372,5.168 -4.349,5.169 -4.325,5.17
  silkscreen extent -4.47,-2.6 4.47,6.1, body extent -4.47,-2.6 4.47,5.31, height 3.31
"IND 0201_0603" [mm] "Inductor, 2-Leads, Body 0.60x0.30mm, IPC Medium Density"
  rect 0.35x0.25 smd: 1(-0.31,0) 2(0.31,0)
  silkscreen extent -0.67,-0.33 0.67,0.33, body extent -0.3,-0.15 0.3,0.15, height 0.3
JT-2450AT18A100-2_V [mm] "Chip Antenna, 2-Leads, Body 3.4x1.8mm"
  rect 0.8x1.6 smd: 1(-1.7,0) 2(1.7,0)
  silkscreen extent -2.77,-0.9 0.91,0.9, body extent -1.7,-0.9 1.7,0.9, height 1.4
"NDK NX3225SA" [mm] "Crystal, 4-Leads, Body 2.50x3.20mm, Pitch 2.20mm, IPC Medium Density"
  rect 1.4x1.2 smd: 1(-1.1,-0.8) 2(1.1,-0.8) 3(1.1,0.8) 4(-1.1,0.8)
  silkscreen extent -2.25,-1.85 2.1,1.7, body extent -1.61,-1.26 1.61,1.26, height 0.6
PCBComponent_1 [mm]
  rect 0.65x0.22 smd mask+0.05: 1(-3.425,2.6) 2(-3.425,2.2) 3(-3.425,1.8) 4(-3.425,1.4) 5(-3.425,1) 6(-3.425,0.6) 7(-3.425,0.2) 8(-3.425,-0.2) 9(-3.425,-0.6) 10(-3.425,-1) 11(-3.425,-1.4) 12(-3.425,-1.8) 13(-3.425,-2.2) 14(-3.425,-2.6) 29(3.425,-2.6) 30(3.425,-2.2) 31(3.425,-1.8) 32(3.425,-1.4) 33(3.425,-1) 34(3.425,-0.6) 35(3.425,-0.2) 36(3.425,0.2) 37(3.425,0.6) 38(3.425,1) 39(3.425,1.4) 40(3.425,1.8) 41(3.425,2.2) 42(3.425,2.6)
  rect 0.22x0.65 smd mask+0.05: 15(-2.6,-3.425) 16(-2.2,-3.425) 17(-1.8,-3.425) 18(-1.4,-3.425) 19(-1,-3.425) 20(-0.6,-3.425) 21(-0.2,-3.425) 22(0.2,-3.425) 23(0.6,-3.425) 24(1,-3.425) 25(1.4,-3.425) 26(1.8,-3.425) 27(2.2,-3.425) 28(2.6,-3.425) 43(2.6,3.425) 44(2.2,3.425) 45(1.8,3.425) 46(1.4,3.425) 47(1,3.425) 48(0.6,3.425) 49(0.2,3.425) 50(-0.2,3.425) 51(-0.6,3.425) 52(-1,3.425) 53(-1.4,3.425) 54(-1.8,3.425) 55(-2.2,3.425) 56(-2.6,3.425)
  rect 4.1x4.1 smd paste-1.55: 57(0,0)
  round 0.5 hole 0.4 mask+0: 58(-0.75,1.5) 59(0.75,1.5) 60(-1.5,0.75) 61(0,0.75) 62(1.5,0.75) 63(-0.75,0) 64(0.75,0) 65(-1.5,-0.75) 66(0,-0.75) 67(1.5,-0.75) 68(-0.75,-1.5) 69(0.75,-1.5)
  silkscreen extent -4.55,-3.5 3.5,3.5, body extent -3.47,-3.54 3.53,3.46, height 1.02
PTH-M2D5X5 [mm]
  round 5 hole 2.5: 1(0,0)
RESC0402(1005)_L [mm] "Chip Resistor, Body 1.0x0.5mm, IPC High Density"
  rrect25% 0.5x0.55 smd: 1(-0.45,0) 2(0.45,0)
  silkscreen extent 0,-0.2 0,0.2, body extent -0.5,-0.25 0.5,0.25, height 0.3
STM-SOT-23-3_V [mm] "SOT23, 3-Leads, Body 3.016x2.8mm, Pitch 0.95mm"
  rect 0.9x0.95 smd: 1(-0.95,-1.25) 2(0.95,-1.25) 3(0,1.25)
  silkscreen extent -1.3,-0.38 1.3,1.25, body extent -1.14,-1.25 1.17,1.36, height 1.25

## Part data
C1 C2: library part CMP-001-00072-4, "Chip Capacitor, 12pF +/-10%, 50V, 0402, Thickness 0.33 mm", Case/Package=0402, Max Operating Temperature=85°C, Min Operating Temperature=-55°C, Tolerance=20%, Voltage Rating=50V, Mounting Technology=SMT, Pins=2
C3 C4 C6 C8 C13 C17: library part CMP-001-00063-3, "Chip Capacitor, 1µF +/-20%, 10V, 0402, Thickness 0.6 mm", Case/Package=0402, Max Operating Temperature=85°C, Min Operating Temperature=-55°C, Tolerance=10%, Voltage Rating=10V, Mounting Technology=SMT, Pins=2
C5 C9 C10 C14 C15: library part CMP-001-00061-3, "Chip Capacitor, 100nF +/-20%, 10V, 0402, Thickness 0.6 mm", Case/Package=0402, Max Operating Temperature=85°C, Min Operating Temperature=-55°C, Tolerance=20%, Voltage Rating=10V, Mounting Technology=SMT, Pins=2
C7: library part CMP-001-00074-3, "Chip Capacitor, 10µF +/-40%, 6.3V, 0402, Thickness 0.6 mm", Case/Package=0402, Max Operating Temperature=85°C, Min Operating Temperature=-55°C, Tolerance=10%, Voltage Rating=6.3V, Mounting Technology=SMT, Pins=2
C11 C12: library part CMP-001-00001-6, "Chip Capacitor, 0.1 uF, +/- 5%, 16 V, 0402 (1005 Metric)", Capacitor Type=Ceramic, Case/Package=0402, Max Operating Temperature=125°C, Min Operating Temperature=-55°C, Tolerance=5%, Voltage Rating=16V, Mounting Technology=SM, Pins=2, RoHS Compliant=True
C16: library part CMP-001-00056-4, "Chip Capacitor, 2,2µF +/-20%, 10V, 0402, Thickness 0.6 mm", Case/Package=0402, Max Operating Temperature=85°C, Min Operating Temperature=-55°C, Tolerance=10%, Voltage Rating=10V, Mounting Technology=SMT, Pins=2
E1: library part CMP-2000-05167-1, "Ceramic Antenna, 2.45 GHZ, 2 W, -40 to 125 degC, 2-Pin SMD, RoHS, Tape and Reel", Manufacturer="Johanson Technology", Maximum Frequency=2500MHz, Minimum Frequency=2400MHz, Package=2Case18-4, Category=Antenna, Datasheet URL=http://www.johansontechnology.com/datasheets/antennas/2450AT18A100.pdf, Datasheet Version="Rev. 1.3, 07/2014", Manufacturer URL=https://www.johansontechnology.com/, Type=Ceramic, Typical Antenna Gain=0.5dB
J1: library part CMP-04775-000011-1, "CONN FFC/FPC BOTTOM 40P .5MM R/A", Actuator Color=Black, Current Rating=500mA, Flammability Rating="UL94 V-0", Housing Color=Beige, Max Operating Temperature=105°C, Min Operating Temperature=-40°C, Voltage Rating=50V, Actuator Material=Nylon, Contact Material=Bronze, Contact Plating=Gold, Gender=Receptacle, Halogen Free="Low Halogen", Height=1.9mm, Housing Material=Polymer, Mating Cycles=25, Mount="Surface Mount", Number of Circuits=40, Number of Contacts=40, Number of Pins=40, Number of Positions=40, Number of Rows=1, Orientation="Right Angle", Packaging="Cut Tape", Pitch=0.5mm, Series="Easy-On 505110", Termination=Solder
J2: library part CMP-005-000001-1, "USB Connectors 24 Receptacle 1 8.94*7.3mm RoHS", Package=Package, Availability="Not in stock", Check_prices=https://www.snapeda.com/parts/TYPE-C-31-M-12/HRO+Electronics+Co.%252C+Ltd./view-part/?ref=eda, Component Type=Standard, Design Item ID=TYPE-C-31-M-12, MF="HRO Electronics Co., Ltd.", MP=TYPE-C-31-M-12, Pin Count=16, Price=None, SnapEDA_Link=https://www.snapeda.com/parts/TYPE-C-31-M-12/HRO+Electronics+Co.%252C+Ltd./view-part/?ref=snap, Source=TYPE-C-31-M-12.SchLib
L1: library part WLCM0603TGB2N0TB, "INDUCTOR FIXED 2.0NH 0201", Current Rating (Amps)="450 mA", DC Resistance (DCR)="200mOhm Max", Device Package="0201 (0603 Metric)", Frequency - Self Resonant=12.5GHz, Inductance Frequency - Test="500 MHz", Manufacturer="Walsin Technology Corporation", Operating Temperature="-55°C ~ 125°C", Q @ Freq="12 @ 500MHz", Supplier Device Package=0201, Supplier Part Number 1=1292-WLCM0603TGB2N0TBCT-ND, Tolerance=±0.1nH, ComponentLink1Description=Datasheet, ComponentLink1URL=https://www.passivecomponent.com/wp-content/uploads/inductor/WLCM0603TG_Series.pdf, ComponentLink2Description="DigiKey Link", ComponentLink2URL=https://www.digikey.com/en/products/detail/walsin-technology-corporation/WLCM0603TGB2N0TB/14563834, Height - Seated (Max)="0.013\" (0.33mm)", Inductance="2 nH", LastUpdated="1/2/2023 9:01:21 PM", Lifecycle Status=Active, Material - Core=Ceramic, Minimum Order=1, Mounting Type="Surface Mount", Package / Case="0201 (0603 Metric)", Packaging=CutTape, Part Number=WLCM0603TGB2N0TB, Part Status=Active, PartId=3830, Price=0.01, Series=CM, Shielding=Unshielded, Size / Dimension="0.024\" L x 0.012\" W (0.60mm x 0.30mm)", Supplier 1=DigiKey, Type=Multilayer
L2: library part WLCM0603TGB2N0TB, "INDUCTOR FIXED 2.0NH 0201", Current Rating (Amps)="450 mA", DC Resistance (DCR)="200mOhm Max", Device Package="0201 (0603 Metric)", Frequency - Self Resonant=12.5GHz, Inductance="2 nH", Inductance Frequency - Test="500 MHz", Manufacturer="Walsin Technology Corporation", Operating Temperature="-55°C ~ 125°C", Q @ Freq="12 @ 500MHz", Supplier Device Package=0201, Supplier Part Number 1=1292-WLCM0603TGB2N0TBCT-ND, Tolerance=±0.1nH, ComponentLink1Description=Datasheet, ComponentLink1URL=https://www.passivecomponent.com/wp-content/uploads/inductor/WLCM0603TG_Series.pdf, ComponentLink2Description="DigiKey Link", ComponentLink2URL=https://www.digikey.com/en/products/detail/walsin-technology-corporation/WLCM0603TGB2N0TB/14563834, Height - Seated (Max)="0.013\" (0.33mm)", LastUpdated="1/2/2023 9:01:21 PM", Lifecycle Status=Active, Material - Core=Ceramic, Minimum Order=1, Mounting Type="Surface Mount", Package / Case="0201 (0603 Metric)", Packaging=CutTape, Part Number=WLCM0603TGB2N0TB, Part Status=Active, PartId=3830, Price=0.01, Series=CM, Shielding=Unshielded, Size / Dimension="0.024\" L x 0.012\" W (0.60mm x 0.30mm)", Supplier 1=DigiKey, Type=Multilayer
P1 P2: "Header, 9-Pin", LatestRevisionDate=17-Jul-2002, LatestRevisionNote="Re-released for DXP Platform.", Publisher="Altium Limited"
P3: "Header, 10-Pin", LatestRevisionDate=17-Jul-2002, LatestRevisionNote="Re-released for DXP Platform.", Publisher="Altium Limited"
Q1: library part CMP-0434-00001-1, "N-channel 60 V, 1.8 Ohm, 0.35 A STripFET(TM) II Power MOSFET, SOT23", Manufacturer=STMicroelectronics, ComponentLink1Description="Manufacturer URL", ComponentLink1URL=http://www.st.com/, ComponentLink2Description=Datasheet, ComponentLink2URL=http://www.st.com/st-web-ui/static/active/en/resource/technical/document/datasheet/CD00005134.pdf, DatasheetVersion="Rev. 9, 11/2008", Mounting Technology="Surface Mount", PackageDescription="3-Pin SOT23, 3.016 x 2.8 mm Body, 0.95 mm Pitch", PackageReference=SOT-23, PartNumber=2N7002
R1: library part CMP-009-00066-2, "10K 0.063W 1% 0402 (1005 Metric)  SMD", Case/Package=0402, Power=63mW, Tolerance=1%, Mounting Technology=SMT, Pins=2
R2 R3 R4 R5: library part CMP-009-00062-2, "Jumper 0402 (1005 Metric)", Case/Package=0402, Mounting Technology=SMT, Pins=2
ST1 ST2 ST3 ST4: library part CMP-00028-00004-2, "M2 PTH (2.5mm), 5mm pad", Pins=1
SW1 SW2: library part CMP-10040-000001-2, "SWITCH TACTILE SPST-NO 0.05A 16V", Case/Package=SMD/SMT, Color=Black, Current Rating=50mA, Max Operating Temperature=85°C, Min Operating Temperature=-40°C, Operating Force=160gf, Package Quantity=2900, Voltage Rating (DC)=16V, Actuator Type=Standard, Contact Plating=Silver, Depth=4.6mm, Illumination Type=Non-Illuminated, Lead Free="Lead Free", Length=3.2mm, Max Current Rating=50mA, Mechanical Life=150000Cycles, Mount="Surface Mount", Orientation=Straight, Packaging="Tape and Reel", RoHS Compliant=Yes, Switch Function=Off-Mom, Switch Travel=0.15mm, Termination=J-Bend, Throw Configuration=SPST
U1: library part CMP-12756-000035-1, "IC REG LINEAR 3.3V 600MA SOT25", Case/Package=SOT-23-5, Dropout Voltage=250mV, Max Input Voltage=6V, Max Operating Temperature=85°C, Max Output Current=600mA, Min Input Voltage=2.5V, Min Operating Temperature=-40°C, Output Voltage=3.3V, Package Quantity=1, Quiescent Current=55uA, Accuracy=1.5%, Height=1.3mm, Lead Free="Lead Free", Length=3.1mm, Mount="Surface Mount", Number of Outputs=1, Number of Pins=5, Number of Regulators=1, Output Current=600mA, Output Type=Fixed, Packaging="Tape and Reel", Polarity=Positive, Width=1.7mm
U2: library part CMP-2000-05026-1, "Intelligent Control LED Integrated Light Source, 3.5 to 5.3 V, -25 to 80 degC, 4-Pin SMD, RoHS, Tape and Reel", Color=Red,Green,Blue(RGB), Manufacturer=Adafruit-Industries-LLC, Package Description="4-Pin Surface Mount Device, Body 5 x 5 mm", Category=Optoelectronics, Configuration=Discrete, Controller Type=-, Datasheet URL=http://datasheet.octopart.com/ADA1655-Adafruit-Industries-datasheet-32028139.pdf, Datasheet Version=May-13, Family=Addressable,Specialty, Interface=-, Manufacturer URL=https://www.adafruit.com/, Mounting Type=SurfaceMount, Number of LEDs=10, Package Reference=1655, Series=Neopixel, Size / Dimension=5.00mmLx5.00mmW, Utilized LED=WS2812(5050)
U*1: "ESP32 MCU"
Y1: library part NX3225SA-40M-EXS00A-CS03880, "CRYSTAL 40.0000MHZ 10PF SMD", ESR (Equivalent Series Resistance)="50 Ohms", Frequency Stability=±17ppm, Frequency Tolerance=±10ppm, Load Capacitance=10pF, Manufacturer="NDK America, Inc.", Operating Mode=Fundamental, Operating Temperature="-40°C ~ 85°C", Package / Case="4-SMD, No Lead", Supplier Part Number 1=644-1249-1-ND, ComponentLink1Description=Datasheet, ComponentLink1URL=//media.digikey.com/pdf/Data%20Sheets/NDK%20PDFs/NX3225SA-40M-EXS00A-CS03880.pdf, ComponentLink2Description="DigiKey Link", ComponentLink2URL=https://www.digikey.com/en/products/detail/ndk-america-inc/NX3225SA-40M-EXS00A-CS03880/5015625, Frequency="40 MHz", Height - Seated (Max)="0.024\" (0.60mm)", LastUpdated="1/2/2023 8:58:25 PM", Lifecycle Status=Active, Minimum Order=1, Mounting Type="Surface Mount", Packaging=TapeAndReel, Part Number=NX3225SA-40M-EXS00A-CS03880, Part Status=Active, PartId=586, Price=0.36, Series=NX3225SA, Size / Dimension="0.126\" L x 0.098\" W (3.20mm x 2.50mm)", Supplier 1=DigiKey, Type="MHz Crystal"

## Via types
v1: diameter 0.8, hole 0.4, Top Layer to Bottom Layer, tented both sides, 145 vias
v2: diameter 0.45, hole 0.25, Top Layer to Bottom Layer, tented both sides, 51 vias
v3: diameter 0.6, hole 0.3, Top Layer to Bottom Layer, tented both sides, 2 vias
v4: diameter 0.75, hole 0.45, Top Layer to Bottom Layer, tented both sides, 1 vias

## Nets (pads, with @x,y where several pads share a name; then routed paths per layer and width w, separated by ;. In a path a pad name is that pad's centre, name@x,y a point inside that pad or via, vN(x,y) a via of type N, cw(c..) or ccw(c..) an arc to the next point about the centre after c; other vN are vias at no path point)
3V3: C4.1 C5.1 C6.1 C7.1 C8.1 C9.1 C15.1 C16.1 J1.6 J1.7 J1.39 J1.40 L1.1 P1.2 P2.2 Q1.3 R1.1 U1.5 U2.1 U*1.20 U*1.46 U*1.55 U*1.56 | length 166.8
  Top Layer w0.2: v2(75.692,72.898) R1.1 ; v2(77.47,78.613) C7.1 ; v2(78.232,79.248) 78.273,79.289 78.826,79.289 C4.1 C5.1 79.924,79.289 C5.1@79.949,79.289 ; v2(80.518,79.248) 80.477,79.289 C5.1@79.949,79.289 ; U*1.55 U*1.56 81.601,77.82 81.591,77.83 81.408,77.83 C5.1@79.949,79.289 ; U*1.20 83.611,70.745 83.611,70.313 83.947,69.977 C15.1 84.095,69.263 84.534,69.263 v2(84.582,69.215) ; v2(84.963,78.994) C6.1 ; v2(84.963,80.01) C8.1 C6.1 ; U*1.46 85.611,77.615 85.611,78.949 C6.1
  Top Layer w0.3: C9.1 77.539,74.929 77.639,74.829 77.664,74.829 77.788,74.705 78.203,74.705 v2(78.232,74.676) 78.486,74.93 L1.1
  Int2 (PWR) w0.2: v3(74.676,68.707) 75.565,68.707 77.724,70.866 ; 83.248,65.341 84.582,66.675 v2(84.582,69.215)
  Int2 (PWR) w0.3: v2(75.692,72.898) 77.47,74.676 v2(78.232,74.676) ; 90.268,76.933 90.805,77.47 v2(93.218,77.47) ; v2(91.313,65.659) 91.313,63.754 91.885,63.182 v2(93.472,61.595)
  Int2 (PWR) w0.5: v2(84.963,78.994) v2(84.963,80.01) 90.138,85.185 93.44,85.185 P2.2 ; P1.2 97.409,58.166
  Int2 (PWR) w0.75: v2(75.692,72.898) 77.724,70.866 83.248,65.341 84.836,63.754 ; v2(77.47,78.613) 77.966,79.109 84.258,79.109 84.373,78.994 v2(84.963,78.994) 86.135,77.822 89.379,77.822 90.268,76.933 90.551,76.65 90.551,69.469 84.836,63.754 ; 84.836,63.754 86.995,61.595 v2(93.472,61.595) 96.901,58.166 97.409,58.166 114.427,58.166 v2(127.127,70.866) ; v2(127.127,70.866) v2(127.889,70.866) v2(127.889,71.374) v2(127.127,71.374) v2(127.127,70.866)
  Bottom Layer w0.2: U2.1 73.733,68.707 v3(74.676,68.707)
  Bottom Layer w0.3: Q1.3 91.313,64.79 v2(91.313,65.659) ; v2(93.218,77.47) 93.581,77.833 J1.7 J1.6 ; J1.40 93.734,61.333 v2(93.472,61.595) 93.513,61.595 93.751,61.833 J1.39
  Bottom Layer w0.5: C16.1@126.307,71.984 C16.1 126.307,72.021 127.172,72.021 127.127,71.976 v2(127.127,71.374) ; U1.5 U1.5@127.943,72.033 ; v2(127.127,71.374) 127.508,71.374 ; v2(127.127,71.374) v2(127.127,70.866) 127.508,70.866 ; 127.508,70.866 127.508,71.374 ; 127.508,70.866 v2(127.889,70.866) v2(127.889,71.374) ; 127.508,71.374 127.508,71.979 127.562,72.033 U1.5@127.943,72.033 ; 127.508,71.374 v2(127.889,71.374) ; v2(127.889,71.374) 127.889,71.979 U1.5@127.943,72.033
GND: C1.1 C2.1 C3.2 C4.2 C5.2 C6.2 C7.2 C8.2 C9.2 C10.2 C11.2 C12.2 C13.2 C14.2 C15.2 C16.2 C17.2 J1.5 J1.16 J1.17 J1.18 J1.19 J1.20 J1.21 J1.22 J1.23 J1.24 J1.25 J1.26 J1.27 J1.28 J1.29 J1.30 J1.31 J1.32 J1.34 J1.35 J1.36 J1.37 J1.38 J2.A1/B12 J2.B1/A12 J2.S1 J2.S2 J2.S3 J2.S4 P1.1 P2.1 R3.1 R4.2 SW1.3 SW1.4 SW2.3 SW2.4 U1.2 U2.3 U*1.57 U*1.58 U*1.59 U*1.60 U*1.61 U*1.62 U*1.63 U*1.64 U*1.65 U*1.66 U*1.67 U*1.68 U*1.69 Y1.2 Y1.4 | length 35.7
  Top Layer w0.2: v2(75.714,73.936) 75.725,73.925 76.374,73.925 C3.2 ; v2(76.073,74.93) 76.085,74.942 76.627,74.942 C9.2 ; v2(76.073,75.962) 76.077,75.966 76.635,75.966 C10.2
  Top Layer w0.3: C11.2 v2(76.327,78.486) ; C12.2 78.932,77.822 79.6,77.822 v2(79.629,77.851) ; C4.2 v2(78.867,80.899) ; C5.2 v2(79.883,80.899) ; C1.1 v2(80.391,83.312) ; Y1.4 82.042,81.031 v2(82.042,80.01) ; Y1.2 83.647,83.312 v2(85.217,83.312) C2.1 ; v2(83.947,67.945) C15.2
  Top Layer w0.5: C7.2 v2(77.47,80.899) ; C6.2 v2(87.249,78.994) ; C8.2 v2(87.249,80.01) ; C13.2 v2(89.49,70.059) ; C14.2 89.569,72.864 v2(89.783,72.65)
  Bottom Layer w0.3: v2(93.501,78.501) 93.538,78.501 93.87,78.833 J1.5
  Bottom Layer w0.5: v2(92.71,63.246) C17.2 ; v4(129.159,70.993) 129.227,70.993 129.294,71.061 130.427,71.061 U1.2 ; J2.B1/A12 134.839,67.883 134.889,67.833 134.889,67.812 135.072,67.628 135.072,66.835 J2.S2 J2.S4 ; J2.A1/B12 134.839,74.283 134.889,74.333 134.889,74.354 135.072,74.538 135.072,75.331 J2.S1 J2.S3 ; SW2.4 SW2.3 ; SW1.4 SW1.3
  other v1: 75,51 78,51 81,51 84,51 87,51 90,51 93,51 114,51 117,51 120,51 123,51 126,51 129,51 132,51 135,51 76.5,54 79.5,54 82.5,54 85.5,54 88.5,54 91.5,54 106.5,54 109.5,54 115.5,54 118.5,54 121.5,54 124.5,54 127.5,54 130.5,54 133.5,54 72,57 75,57 78,57 81,57 84,57 87,57 111,57 114,57 117,57 120,57 123,57 126,57 129,57 132,57 135,57 138,57 73.5,60 76.5,60 79.5,60 82.5,60 85.5,60 118.5,60 121.5,60 124.5,60 127.5,60 130.5,60 133.5,60 136.5,60 72,63 75,63 78,63 81,63 96,63 99,63 102,63 105,63 108,63 111,63 73.5,66 76.5,66 79.5,66 115.5,66 118.5,66 124.5,66 127.5,66 130.5,66 133.5,66 72,69 78,69 138,69 73.5,72 91.5,72 115.5,72 118.5,72 121.5,72 136.5,72 139.5,72 72,75 117,75 120,75 123,75 126,75 129,75 132,75 97.5,78 115.5,78 118.5,78 121.5,78 124.5,78 127.5,78 130.5,78 133.5,78 75,81 93,81 117,81 120,81 123,81 126,81 129,81 132,81 135,81 138,81 73.5,84 76.5,84 79.5,84 91.5,84 75,87 78,87 81,87 84,87 87,87 90,87 93,87 99,87 114,87 117,87 120,87 123,87 126,87 129,87 132,87 135,87 76.5,90 79.5,90 82.5,90 85.5,90 88.5,90 91.5,90 94.5,90 118.5,90 121.5,90 124.5,90 127.5,90 130.5,90 133.5,90
NetC1_2: C1.2 R2.1 Y1.3 | length 5.6
  Top Layer w0.2: R2.1 81.338,79.832 80.391,80.779 C1.2 80.541,81.869 80.704,81.869 82.004,83.169 Y1.3
NetC2_2: C2.2 U*1.53 Y1.1 | length 5.7
  Top Layer w0.2: U*1.53 82.801,78.864 83.604,79.667 Y1.1 84.542,81.069 85.192,81.719 C2.2
NetC3_1: C3.1 R1.2 SW1.1 SW1.2 U*1.4 | length 75.4
  Top Layer w0.2: R1.2 C3.1 v2(78.105,73.914) 78.142,73.914 78.838,74.61 78.838,75.445 79.178,75.786 79.767,75.786 79.846,75.707 80.332,75.707 80.37,75.668 80.473,75.668 80.561,75.58 U*1.4
  Bottom Layer w0.2: v2(78.105,73.914) 78.105,73.96 77.757,74.308 77.757,74.873 78.421,75.536 78.929,75.536 79.338,75.946 82.296,75.946 83.248,76.898 86.677,76.898 94.361,84.582 135.587,84.582 136.803,83.366 137.003,83.366 137.228,83.141 SW1.1 SW1.2
NetC10_1: C10.1 L1.2 U*1.2 U*1.3 | length 3.7
  Top Layer w0.2: C10.1 78.461,75.97 78.486,75.995 L1.2 78.501,75.987 78.953,75.987 79.053,76.088 80.453,76.088 80.561,75.98 U*1.3 U*1.2
NetC11_1: C11.1 E1.1 L2.1 | length 5.4
  Top Layer w0.3: v3(75.438,76.962) 75.445,76.969 76.319,76.969 C11.1 76.331,76.981 77.282,76.981 L2.1
  Bottom Layer w0.3: E1.1 71.921,77.001 75.399,77.001 v3(75.438,76.962)
NetC12_1: C12.1 L2.2 U*1.1 | length 3
  Top Layer w0.2: C12.1 79.7,76.977 79.897,76.78 U*1.1
  Top Layer w0.3: L2.2 77.912,76.981 78.863,76.981 C12.1
NetC13_1: C13.1 C14.1 U*1.29 | length 2.4
  Top Layer w0.2: U*1.29 88.491,71.58 88.875,71.964 C14.1 C13.1
NetC17_1: C17.1 J1.33 Q1.2 | length 6.5
  Bottom Layer w0.3: Q1.2 90.092,65.72 90.556,66.184 91.53,66.184 92.011,65.703 92.011,65.488 92.493,65.007 92.517,65.007 92.685,64.839 C17.1 93.435,64.839 93.441,64.833 J1.33
NetJ1_1: J1.1 P3.1 U*1.6 | length 40.1
  Top Layer w0.2: v2(79.85,74.887) 79.867,74.887 79.974,74.78 U*1.6
  Bottom Layer w0.2: v2(79.85,74.887) 80.466,74.887 83.223,72.13 85.179,72.13 93.832,80.783 94.326,80.783 J1.1
  Bottom Layer w0.3: J1.1 97.216,80.833 98.933,82.55 P3.1
NetJ1_2: J1.2 P3.2 U*1.7 | length 40.3
  Top Layer w0.2: v2(79.375,74.422) 79.407,74.39 80.766,74.39 U*1.7
  Bottom Layer w0.2: v2(79.375,74.422) 79.385,74.412 80.515,74.412 83.098,71.828 85.304,71.828 93.758,80.283 94.326,80.283 J1.2
  Bottom Layer w0.3: J1.2 112.89,80.333 113.213,80.01 P3.2
NetJ1_3: J1.3 P3.3 U*1.8 | length 40.1
  Top Layer w0.2: v2(79.828,73.914) 79.895,73.914 79.961,73.98 U*1.8
  Bottom Layer w0.2: v2(79.828,73.914) 80.564,73.914 82.951,71.527 85.429,71.527 93.685,79.783 94.326,79.783 J1.3
  Bottom Layer w0.3: J1.3 98.983,79.833 101.346,77.47 P3.3
NetJ1_4: J1.4 P3.4 U*1.9 | length 41.7
  Top Layer w0.2: 79.537,73.439 80.207,73.439 80.338,73.57 80.766,73.57 U*1.9
  Bottom Layer w0.2: v2(79.332,73.576) 79.399,73.576 79.537,73.439 80.612,73.439 82.826,71.225 85.554,71.225 93.611,79.283 94.326,79.283 J1.4
  Bottom Layer w0.3: J1.4 98.086,79.333 102.489,74.93 P3.4
NetJ1_9: J1.9 P3.5 U*1.10 | length 40
  Top Layer w0.2: v2(79.756,72.964) 79.804,73.012 80.191,73.012 80.35,73.17 80.766,73.17 U*1.10
  Bottom Layer w0.2: v2(79.756,72.964) 80.579,72.964 82.619,70.924 85.679,70.924 91.588,76.833 J1.9
  Bottom Layer w0.3: J1.9 98.808,76.833 103.251,72.39 P3.5
NetJ1_10: J1.10 P3.6 U*1.11 | length 41.8
  Top Layer w0.2: v2(79.248,72.517) 79.276,72.489 80.095,72.489 80.376,72.77 80.766,72.77 U*1.11
  Bottom Layer w0.2: v2(79.248,72.517) 79.276,72.489 80.627,72.489 82.494,70.622 85.803,70.622 91.514,76.333 J1.10
  Bottom Layer w0.3: J1.10 97.784,76.333 104.267,69.85 P3.6
NetJ1_11: J1.11 P3.7 U*1.12 | length 41.5
  Top Layer w0.2: v2(79.756,72.009) 79.804,72.057 80.106,72.057 80.419,72.37 80.766,72.37 U*1.12
  Bottom Layer w0.2: v2(79.756,72.009) 80.645,72.009 82.334,70.32 85.928,70.32 91.441,75.833 J1.11
  Bottom Layer w0.3: J1.11 96.633,75.833 105.156,67.31 P3.7
NetJ1_13: J1.13 P3.8 U*1.13 | length 42.8
  Top Layer w0.2: v2(79.248,71.501) 79.977,71.501 80.367,71.892 80.473,71.892 80.561,71.98 U*1.13
  Bottom Layer w0.2: v2(79.248,71.501) 80.726,71.501 82.209,70.019 86.053,70.019 90.867,74.833 J1.13
  Bottom Layer w0.3: J1.13 95.855,74.833 105.918,64.77 P3.8
NetJ1_15: J1.15 P3.9 U*1.14 | length 42.1
  Top Layer w0.2: v2(79.756,70.993) 79.804,71.041 80.022,71.041 80.561,71.58 U*1.14
  Bottom Layer w0.2: v2(79.756,70.993) 80.772,70.993 82.048,69.717 86.178,69.717 90.294,73.833 J1.15
  Bottom Layer w0.3: J1.15 95.204,73.833 106.807,62.23 P3.9
NetJ2_A5: J2.A5 R3.2 | length 1.6
  Bottom Layer w0.3: R3.2 133.659,72.067 133.925,72.333 J2.A5
NetJ2_A6: J2.A6 J2.B6 U*1.26 | length 52.7
  Top Layer w0.2: U*1.26 86.001,70.152 87.254,68.898 131.001,68.898 v2(132.461,70.358)
  Bottom Layer w0.3: v2(132.461,70.358) 132.486,70.333 J2.B6 135.145,70.333 135.391,70.579 135.391,71.087 135.145,71.333 J2.A6
NetJ2_A7: J2.A7 J2.B7 U*1.25 | length 53.7
  Top Layer w0.2: U*1.25 85.601,70.125 87.273,68.453 131.318,68.453 133.096,70.231 v2(133.096,71.374)
  Bottom Layer w0.3: v2(133.096,71.374) 133.125,71.345 133.735,71.345 133.747,71.333 ; J2.A7 133.993,70.833 133.747,71.079 133.747,71.333 ; J2.B7 133.993,71.833 133.747,71.587 133.747,71.333
NetJ2_B5: J2.B5 R4.1 | length 1.4
  Bottom Layer w0.3: R4.1 133.272,69.333 J2.B5
NetP1_3: P1.3 U*1.15 | length 29.4
  Top Layer w0.2: U*1.15 81.601,65.338 93.599,53.34 98.425,53.34 P1.3
NetP1_4: P1.4 U*1.16 | length 31.1
  Top Layer w0.2: U*1.16 82.001,65.954 93.853,54.102 100.203,54.102 P1.4
NetP1_5: P1.5 U*1.17 | length 32.9
  Top Layer w0.2: U*1.17 82.401,66.57 94.107,54.864 101.981,54.864 P1.5
NetP1_6: P1.6 U*1.18 | length 34.6
  Top Layer w0.2: U*1.18 82.801,67.313 94.488,55.626 103.759,55.626 P1.6
NetP1_7: P1.7 U*1.19 | length 36.4
  Top Layer w0.2: U*1.19 83.201,68.019 94.832,56.388 105.537,56.388 P1.7
NetP1_8: P1.8 U*1.23 | length 37.5
  Top Layer w0.2: U*1.23 84.801,69.902 85.057,69.646 85.057,67.343 95.123,57.277 107.188,57.277 P1.8
NetP1_9: P1.9 U*1.24 | length 39.2
  Top Layer w0.2: U*1.24 85.201,69.929 85.979,69.151 85.979,67.691 95.377,58.293 108.712,58.293 P1.9
NetP2_3: P2.3 U*1.51 | length 23.3
  Top Layer w0.2: U*1.51 83.611,77.615 83.611,77.955 83.947,78.291 v2(83.947,78.359)
  Bottom Layer w0.2: v2(83.947,78.359) 87.286,78.359 94.398,85.471 96.266,85.471 P2.3
NetP2_4: P2.4 U*1.43 | length 22.6
  Top Layer w0.2: U*1.43 86.801,77.82 87.848,78.867 92.202,78.867 P2.4
NetP2_5: P2.5 U*1.42 | length 24.5
  Top Layer w0.2: U*1.42 88.464,76.78 89.71,78.026 93.901,78.026 P2.5
NetP2_6: P2.6 U*1.41 | length 27.2
  Top Layer w0.2: U*1.41 88.953,76.38 89.408,76.835 95.25,76.835 P2.6
NetP2_7: P2.7 U*1.40 | length 29.9
  Top Layer w0.2: U*1.40 96.935,75.98 P2.7
NetP2_8: P2.8 U*1.39 | length 32.9
  Top Layer w0.2: U*1.39 89.012,75.58 89.408,75.184 98.679,75.184 P2.8
NetP2_9: P2.9 U*1.38 | length 36.1
  Top Layer w0.2: U*1.38 88.269,75.18 89.154,74.295 100.33,74.295 P2.9
NetP3_10: P3.10 R5.1 U*1.27 | length 36.3
  Top Layer w0.2: U*1.27 86.401,70.19 86.704,69.887 86.937,69.887 v2(86.985,69.84)
  Bottom Layer w0.2: v2(86.985,69.84) 87.503,69.321 R5.1 87.478,65.22 86.741,64.483 86.741,63.881 89.641,60.981 97.063,60.981 98.354,59.69 P3.10
NetQ1_1: Q1.1 R5.2 | length 1.5
  Bottom Layer w0.2: R5.2 87.528,64.32 87.877,63.971 87.877,63.961 88.018,63.82 Q1.1
NetR2_2: R2.2 U*1.54 | length 1.3
  Top Layer w0.2: R2.2 82.296,78.809 82.296,78.359 82.401,78.254 U*1.54
NetSW2_1: SW2.1 SW2.2 U*1.5 | length 72.4
  Top Layer w0.2: v2(79.375,75.311) 79.443,75.311 79.537,75.405 80.207,75.405 80.422,75.19 80.766,75.19 U*1.5 ; v2(86.487,68.453) 88.806,66.134 113.52,66.134 116.789,62.865 v2(136.525,62.865)
  Bottom Layer w0.2: v2(79.375,75.311) 78.773,74.709 78.773,70.452 80.772,68.453 v2(86.487,68.453) ; v2(136.525,62.865) 137.152,62.865 SW2.1 SW2.2
NetU2_4: U2.4 U*1.52 | length 12.7
  Top Layer w0.2: U*1.52 83.211,77.615 83.211,78.19 83.312,78.291 v2(83.312,78.359)
  Bottom Layer w0.2: U2.4 73.659,73.833 75.313,75.487 76.757,75.487 77.597,76.327 81.374,76.327 82.319,77.272 82.319,77.366 v2(83.312,78.359)
VBUS: J2.A4/B9 J2.B4/A9 U1.1 U1.3 | length 15.2
  Bottom Layer w0.3: J2.B4/A9 134.719,68.833 135.145,68.833 135.792,69.48 135.792,72.686 135.145,73.333 134.719,73.333 J2.A4/B9
  Bottom Layer w0.5: U1.3 130.978,70.133 131.655,70.81 131.655,71.373 130.995,72.033 U1.1 130.45,73.046 130.973,73.569 133.48,73.569 133.516,73.533 134.519,73.533 J2.A4/B9
pads on no net: E1.2 J1.8 J1.12 J1.14 J1.41 J1.42 J2. J2.A8 J2.B8 ST1.1 ST2.1 ST3.1 ST4.1 U1.4 U2.2 U*1.21 U*1.22 U*1.28 U*1.30 U*1.31 U*1.32 U*1.33 U*1.34 U*1.35 U*1.36 U*1.37 U*1.44 U*1.45 U*1.47 U*1.48 U*1.49 U*1.50

## Polygon pours and split planes (outlines as drawn)
GND on Bottom Layer "GND_L04_P002" (solid, pour order 2): 69.088,92.583 69.088,49.583 141.351,49.583 141.478,92.583
GND on Int2 (PWR) "GND_L03_P005" (solid, pour order 5): 69.088,49.53 69.088,92.583 141.351,92.583 141.351,49.53
GND on Int1 (GND) "GND_L02_P006" (solid, pour order 6): 69.088,49.53 141.351,49.53 141.478,49.657 141.478,92.71 69.088,92.71 69.088,92.456
GND on Top Layer "GND_L01_P007" (solid, pour order 7): 69.088,92.71 69.088,49.53 141.351,49.53 141.351,92.71

## Other copper
Multi-Layer:
  pour cut-out: 69.088,81.407 73.025,81.407 73.025,78.74 73.533,78.232 80.518,78.232 81.153,77.597 81.153,76.581 69.088,76.581

## Silkscreen, mask and mechanical layers (free items; w line width, h text height)
Top Overlay:
  drawing of 21 lines, arcs and shapes, not listed
  text "GND" at 96.522,87.03 h0.75 r90